# Altium PCB NUC977 DEV BOARD.PcbDoc (part 1 of 5)
Units mil, origin at the board's own origin, x right, y up, seen from the top; angles counter-clockwise.
Board outline 9012.5 x 7677.17 mil, 4 copper layers (Top, 2-GND, 3-POWER, Bottom), stack 35.4 mil thick; 487 components, 451 nets, 1969 pads, 1529 vias.
Unrouted connection lines stored in the file: 1.
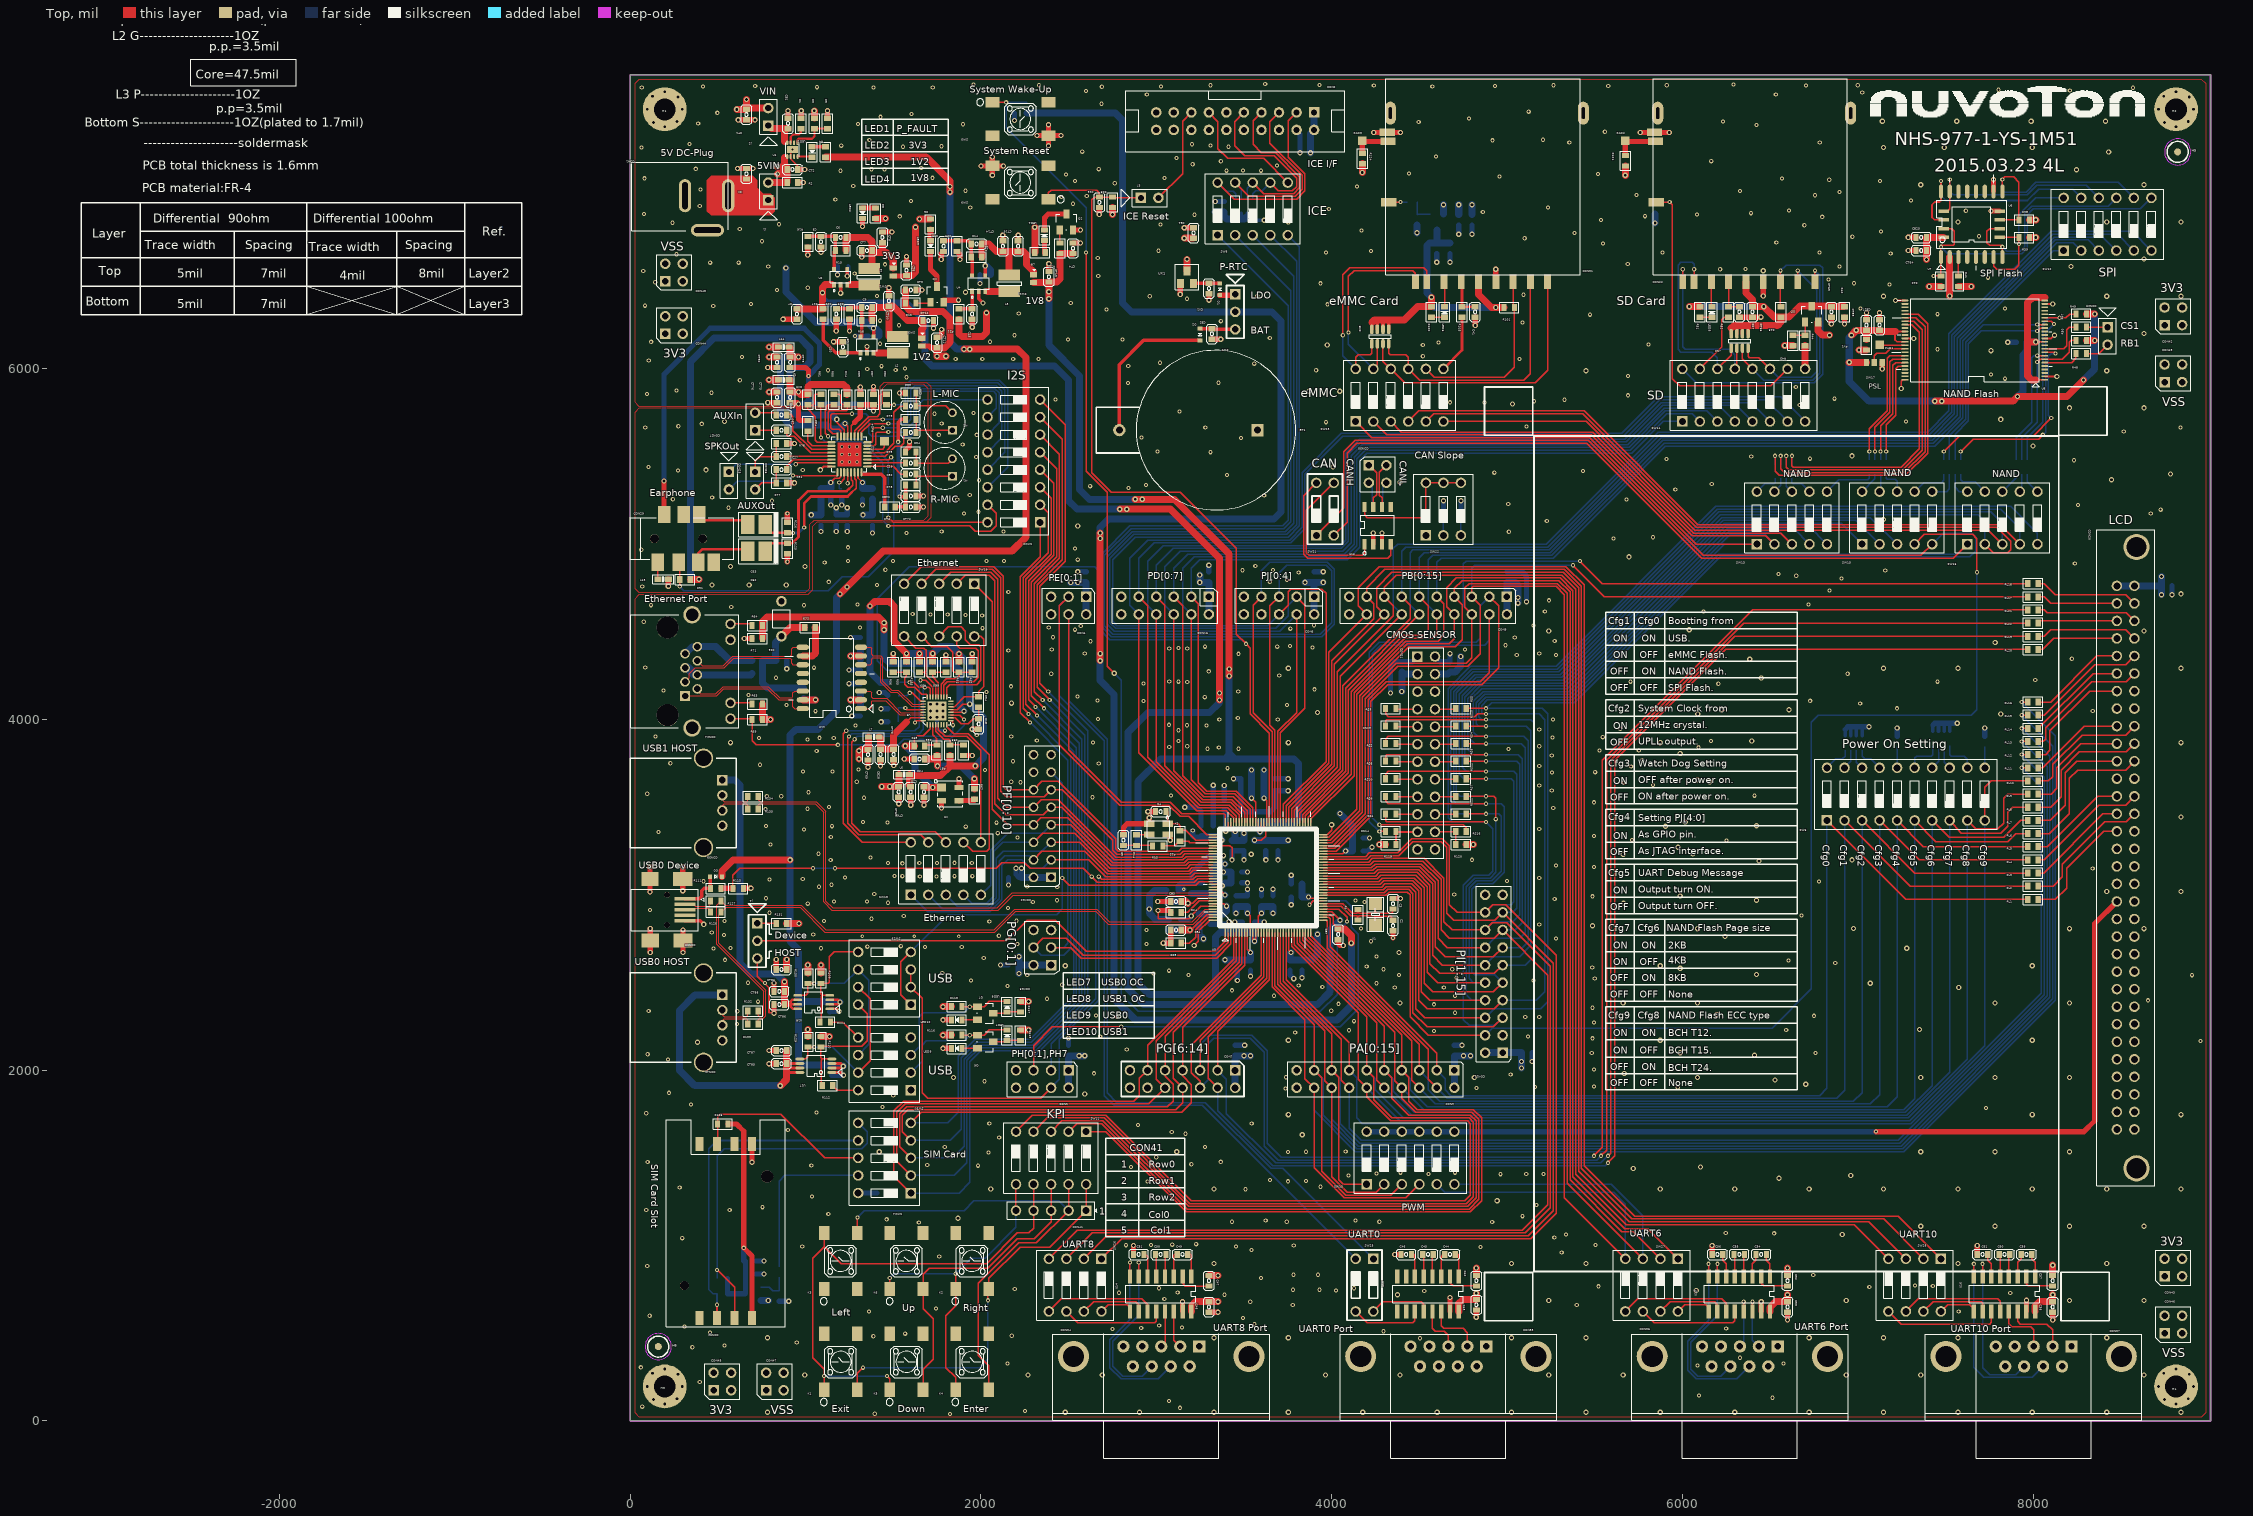
[diagram p0: Top view]
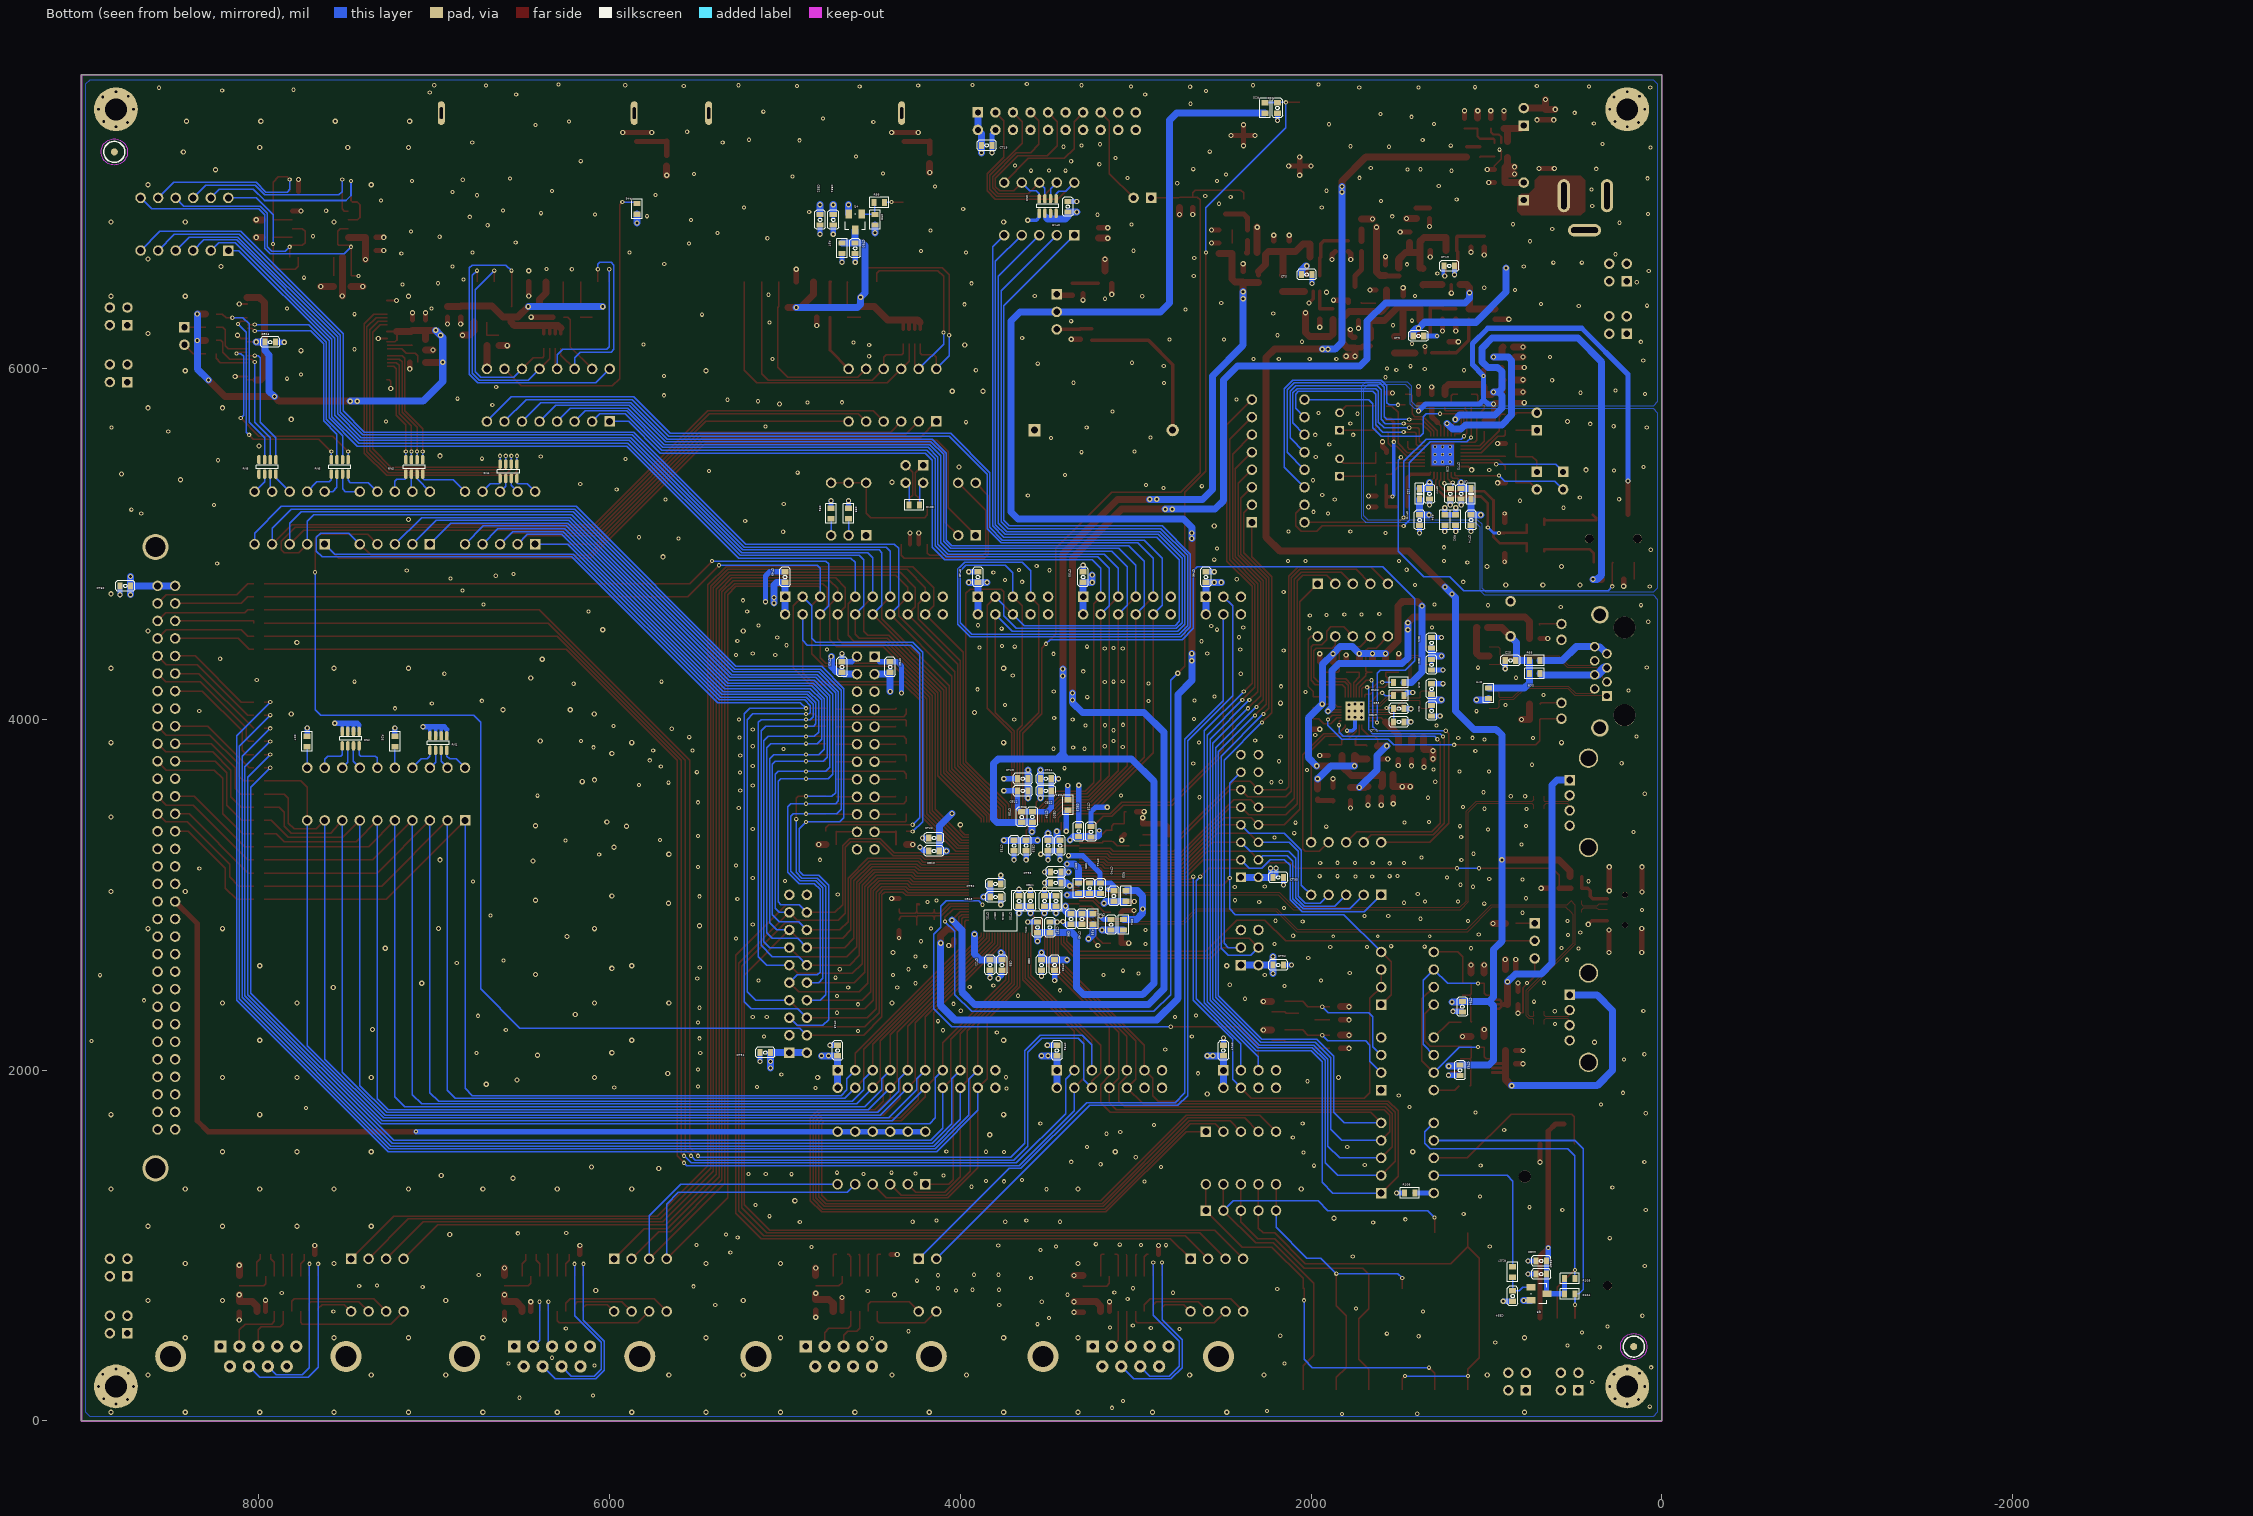
[diagram p1: Bottom view, seen from below]
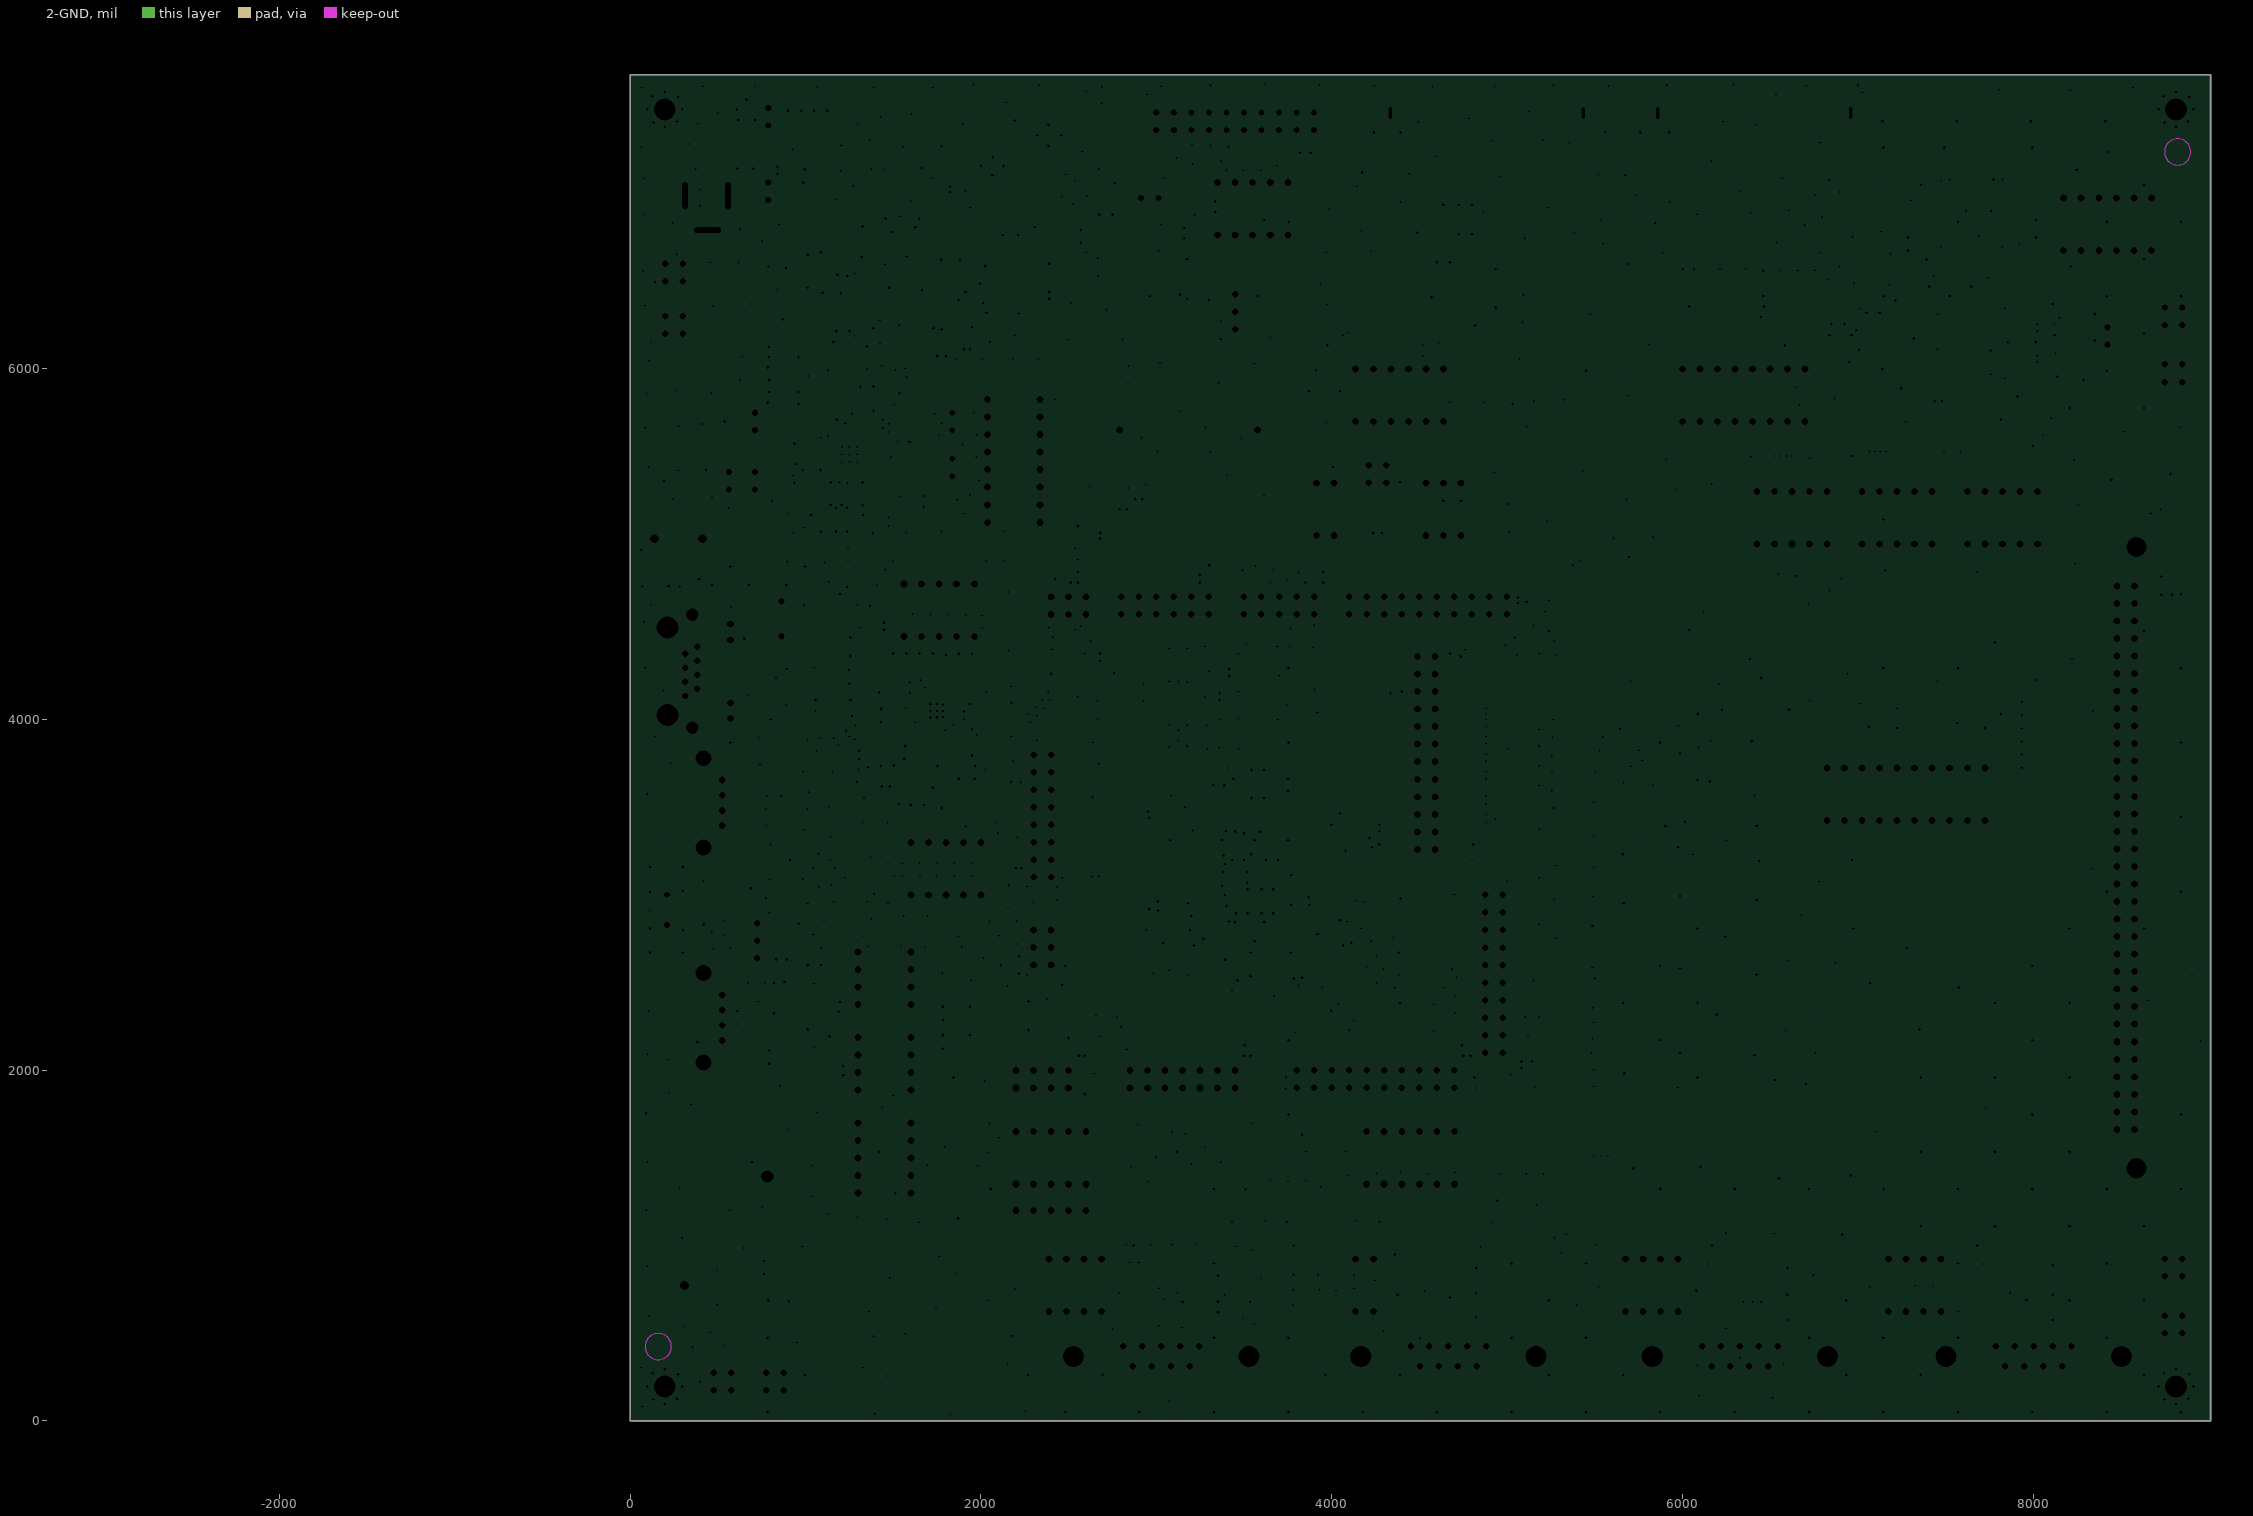
[diagram p2: 2-GND, clearances drawn from the general rule]
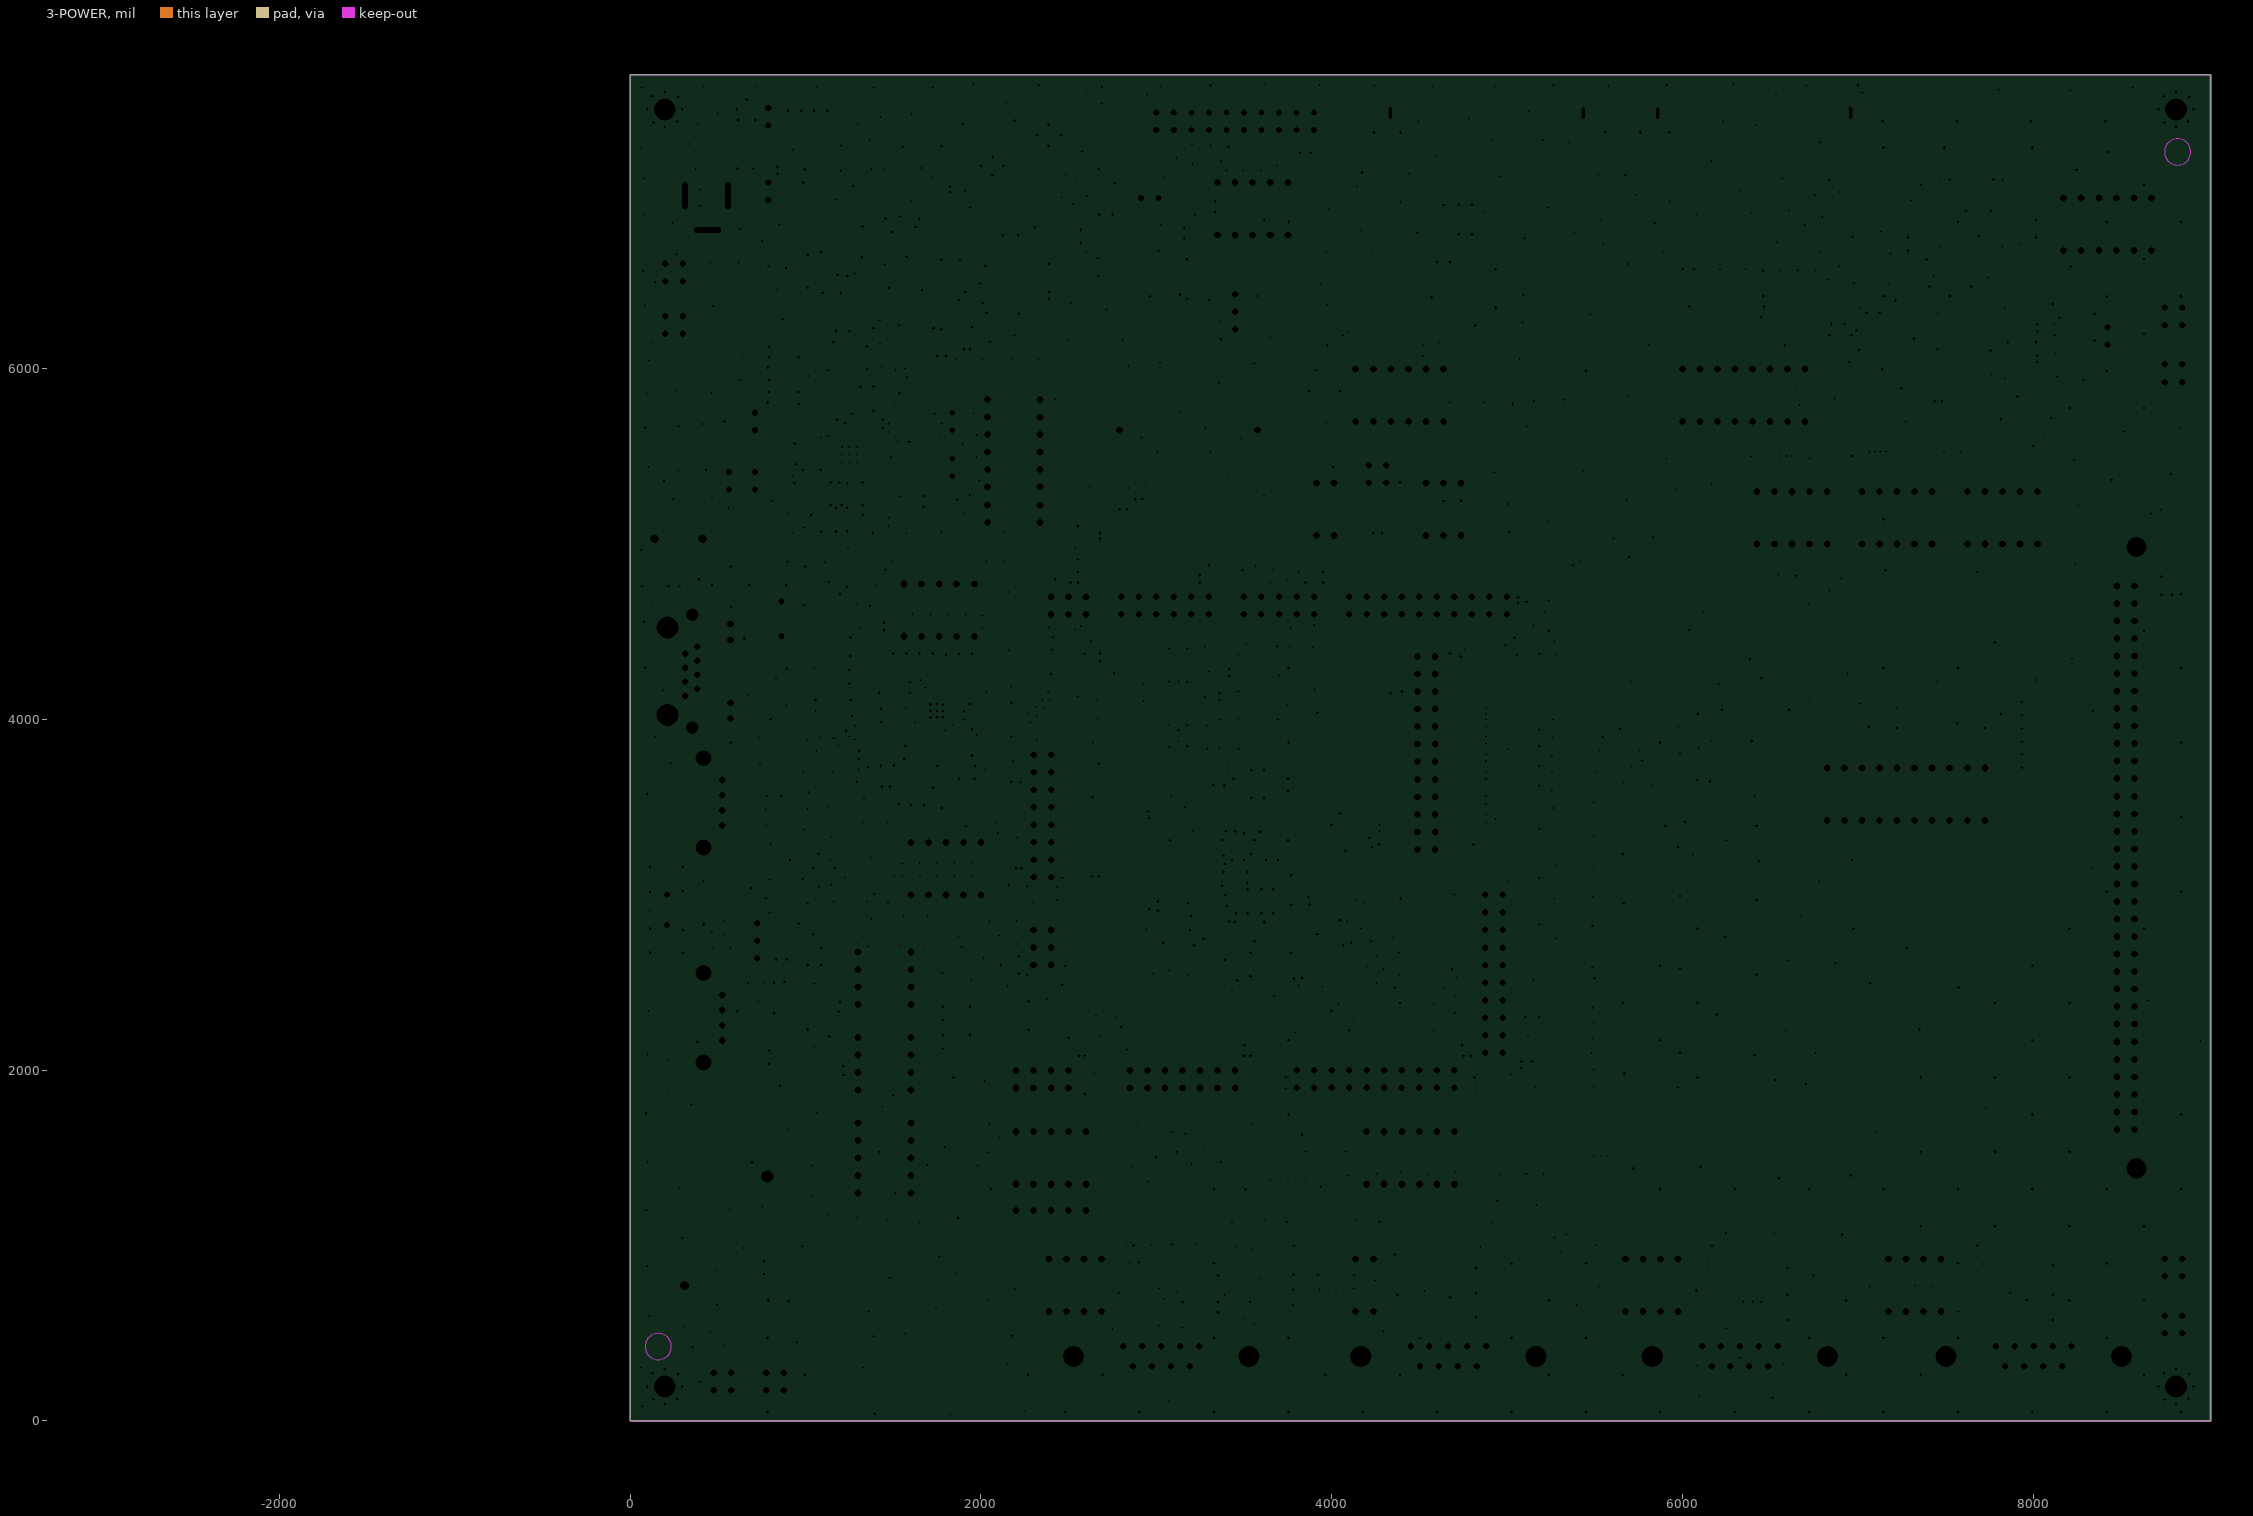
[diagram p3: 3-POWER, clearances drawn from the general rule]

## Layer stack, top to bottom
Solder Mask Top: solder mask 0.4, Solder Resist, Dk 3.5
Top: signal copper 1.35
Dielectric 1: dielectric 10, FR-4, Dk 4.3
2-GND: plane copper 1.35
Dielectric2: dielectric 10, FR-4, Dk 4.3
3-POWER: plane copper 1.35
Dielectric3: dielectric 10, FR-4, Dk 4.3
Bottom: signal copper 1.35
Solder Mask Bottom: solder mask 0.4, Solder Resist, Dk 3.5

## Board outline
0,0 9012.5,0 9012.5,7677.17 0,7677.17

## Design rules (kind name [scope] priority, off if disabled: settings)
Clearance "Clearance - NetClass - USB-5/7/5-90OHM" [InNetClass('USB-5/7/5-90OHM')] p1: gap=7 ignorepadtopadclearanceinfootprint=FALSE except(0: Arc-Hole Track-Hole SMDPad-Hole THPad-Hole Via-Hole Fill-Hole Poly-Hole Region-Hole Text-Hole; 10: Text-Text; 12: Arc-Fill Arc-Poly Arc-Region Track-Fill Track-Poly Track-Region SMDPad-Fill SMDPad-Poly SMDPad-Region THPad-Fill THPad-Poly THPad-Region Via-Fill Via-Poly Via-Region Fill-Fill Fill-Poly Fill-Region Poly-Poly Poly-Region Region-Region)
Clearance "Clearance - NetClass - ETHERNET-4/8/4-100OHM" [InNetClass('ETHERNET-4/8/4-100OHM')] p2: gap=12 ignorepadtopadclearanceinfootprint=FALSE except(0: Arc-Hole Track-Hole SMDPad-Hole THPad-Hole Via-Hole Fill-Hole Poly-Hole Region-Hole Text-Hole; 7: Arc-SMDPad Arc-THPad Arc-Via Arc-Text Track-SMDPad Track-THPad Track-Via Track-Text SMDPad-SMDPad SMDPad-THPad SMDPad-Via SMDPad-Text THPad-THPad THPad-Via THPad-Text Via-Via Via-Text Fill-Text Poly-Text Region-Text; 8: Arc-Arc Arc-Track Track-Track; 10: Text-Text)
Clearance "Clearance - Default - DEFAULT- SMD" [IsVia vs IsSMTPin] p3: gap=6 ignorepadtopadclearanceinfootprint=FALSE
Clearance "Clearance - Default - DEFAULT - Via" [IsVia vs IsVia] p4: gap=6 ignorepadtopadclearanceinfootprint=FALSE
Clearance "Clearance - Default - DEFAULT - Net" [All] p5: gap=12 ignorepadtopadclearanceinfootprint=FALSE except(0: Arc-Hole Track-Hole SMDPad-Hole THPad-Hole Via-Hole Fill-Hole Poly-Hole Region-Hole Text-Hole; 5: Arc-SMDPad Arc-THPad Track-SMDPad Track-THPad SMDPad-SMDPad SMDPad-THPad SMDPad-Via THPad-THPad THPad-Via; 7: Arc-Arc Arc-Track Arc-Via Arc-Text Track-Track Track-Via Track-Text SMDPad-Text THPad-Text Via-Via Via-Text Fill-Text Poly-Text Region-Text; 10: Text-Text)
ComponentClearance "ComponentClearance - Default - DEFAULT" [All] p1: gap=6 collisioncheckmode=3 verticalgap=10 showdistances=FALSE
DiffPairsRouting "DiffPairsRouting - DiffPair - N16118" [InDifferentialPairClass('DiffPairClassFor_DP_GAP_70000_Width_50000')] p1: maxlimit=7 minlimit=7 mostfreqgap=7 toplayer_minwidth=5 toplayer_maxwidth=5 toplayer_prefwidth=5 bottomlayer_minwidth=5 bottomlayer_maxwidth=5 bottomlayer_prefwidth=5 maxuncoupledlength=500
DiffPairsRouting "DiffPairsRouting - DiffPair - Default" [All] p2: maxlimit=8 minlimit=8 mostfreqgap=8 toplayer_minwidth=4 toplayer_maxwidth=4 toplayer_prefwidth=4 bottomlayer_minwidth=4 bottomlayer_maxwidth=4 bottomlayer_prefwidth=4 maxuncoupledlength=500
FanoutControl Fanout_SOIC [IsSOIC] p1: bgadir=Out bgaviamode=Centered fanoutstyle=Auto fanoutdirection=Alternating viagrid=1 // Fanout_SOIC (Default Rule)
FanoutControl Fanout_Small [(CompPinCount < 5)] p2: bgadir=Out bgaviamode=Centered fanoutstyle=Auto fanoutdirection=OutThenIn viagrid=1 // Fanout_Small (Default Rule)
FanoutControl Fanout_LCC [IsLCC] p3: bgadir=Out bgaviamode=Centered fanoutstyle=Auto fanoutdirection=Alternating viagrid=1 // Fanout_LCC (Default Rule)
FanoutControl Fanout_BGA [IsBGA] p4: bgadir=Out bgaviamode=Centered fanoutstyle=Auto fanoutdirection=Alternating viagrid=1 // Fanout_BGA (Default Rule)
HoleToHoleClearance "HoleToHoleClearance - Default - DEFAULT" [All] p1: gap=6 allowstackedmicrovias=TRUE
Length "Default Length" [All] p1: maxlimit=50000 minlimit=0
MaxMinImpedance "Default Impedance" [All] p1: minimum=50.00 maximum=150.0
ParallelSegment "Default Parallel Segment Adjasent" [All] p1: limit=1000 gap=200
ParallelSegment "Default Parallel Segment Same Layer" [All] p2: limit=1000 gap=200
PlaneClearance [All] p1: clearance=20
PlaneConnect "Default PlaneConnect" [All] p1: planeconnectstyle=Relief reliefexpansion=20 reliefentries=0 reliefconductorwidth=20 reliefairgap=10
PolygonConnect "PolygonConnect - Default SMT" [IsSMTPin] p1: connectstyle=Relief reliefconductorwidth=10 reliefentries=4 polygonreliefangle="45 Angle" airgapwidth=10
PolygonConnect "PolygonConnect - Default Pad" [All] p2: connectstyle=Relief reliefconductorwidth=20 reliefentries=4 polygonreliefangle="45 Angle" airgapwidth=10
RoomDefinition "Room: DRW93508986" [All vs False] p1: confinementstyle=ConfineOut formatcopy=TRUE lockcomponents=FALSE outline 8160,570 8435,570 8435,845 8160,845 8160,570
RoomDefinition "Room: DRW86413249" [All vs False] p2: confinementstyle=ConfineOut formatcopy=TRUE lockcomponents=FALSE outline 4875,570 5150,570 5150,845 4875,845 4875,570
RoomDefinition "Room: DRW7866622" [All vs False] p3: confinementstyle=ConfineOut formatcopy=TRUE lockcomponents=FALSE outline 4870,5620 5145,5620 5145,5895 4870,5895 4870,5620
RoomDefinition "Room: DRW11678161" [All vs False] p4: confinementstyle=ConfineOut formatcopy=TRUE lockcomponents=FALSE outline 8150,5625 8425,5625 8425,5900 8150,5900 8150,5625
RoutingLayers "RoutingLayers - Default - DEFAULT" [All] p1: top layer_v5=TRUE bottom layer_v5=TRUE
RoutingPriority "RoutingPriority - Default - DEFAULT" [All] p1: routingpriority=3
RoutingTopology "RoutingTopology - Net - N16076802" [InNet('N16076802') vs InNet('N16076802')] p1: topology=Shortest
RoutingTopology "Default Routing Topology" [All] p2: topology=Shortest
RoutingVias "RoutingVias - Default - DEFAULT" [All] p1: holewidth=16 width=30 viastyle="Through Hole" minholewidth=16 minwidth=30 maxholewidth=16 maxwidth=30
SMDToCorner "SMDToCorner - Default - DEFAULT" [All] p1: distance=60000
SolderMaskExpansion "SolderMaskExpansion from CAM settings" [All] p1: expansion=3
Width "Width - NetClass - USB-5/7/5-90OHM" [InNetClass('USB-5/7/5-90OHM')] p1: maxlimit=100 minlimit=1 preferedwidth=5
Width "Width - NetClass - POWER-40MIL" [InNetClass('POWER-40MIL')] p2: maxlimit=100 minlimit=1 preferedwidth=40
Width "Width - NetClass - GND-30MIL" [InNetClass('GND-30MIL')] p3: maxlimit=100 minlimit=1 preferedwidth=30
Width "Width - NetClass - ETHERNET-4/8/4-100OHM" [InNetClass('ETHERNET-4/8/4-100OHM')] p4: maxlimit=100 minlimit=1 preferedwidth=4
Width "Width - NetClass - CLK-10MIL" [InNetClass('CLK-10MIL')] p5: maxlimit=100 minlimit=3 preferedwidth=10
Width "Default Width" [All] p6: maxlimit=100 minlimit=3 preferedwidth=8
18 further rules are at their usual default settings.

## Classes and differential pairs
net class CLK-10MIL: 50MCLKI EMCLK LCLK RMII0REFCLK S_CLK S_PCLK SC0CLK SDCLK SIICCLK SPICLK
net class ETHERNET-4/8/4-100OHM: MDI_RN MDI_RP MDI_TN MDI_TP RX+ RX- TX+ TX-
net class GND-30MIL: CDAVS PLLVS VS
net class POWER-40MIL: 5VIN EMVD33 NVD33 PHYAD3 PHYAVD33 PHYIOVD33 REGOUT RTCVD SDPWR SDVD33 SPKVD UHVD33 UOVD33 UPL0VD12 UPL1VD12 UV0 UV1 VD12 VD18 VD33 VDDA VDDB VDDC VIN VREF
net class USB-5/7/5-90OHM: N16116600 N16116644 N16117426 N16117430 N16118016 N16118208 UDH0 UDH1 UDO0 UDO1
differential pair class DiffPairClassFor_DP_GAP_70000_Width_50000: N16118 N161166 N161174 UDH UDO
differential pair N16774: +N16774778 -N16774372
differential pair N16118: +N16118208 -N16118016
differential pair RX: +RX+ -RX-
differential pair UDH: +UDH1 -UDH0
differential pair TX: +TX+ -TX-
differential pair MDI_T: +MDI_TP -MDI_TN
differential pair N161174: +N16117426 -N16117430
differential pair DAC: +DAC0 -DAC1
differential pair UDO: +UDO1 -UDO0
differential pair MDI_R: +MDI_RP -MDI_RN
differential pair N161166: +N16116644 -N16116600

## Components (designator, comment, footprint, x,y, rotation, side; value= is the part's Value field where it differs from the comment)
BT1 "BAT$5C$CR2032-4-2" BAT$5C$CR2032-4-2 3183,5650.5 r0 top
C1 "C0603" C0603 662.5,7112.5 r90 top
C2 "C0603" C0603 4350,2825 r270 top
C3 "C0603" C0603 4350,2950 r90 top
C4 "C0603" C0603 3025,3475 r180 top
C5 "C0603" C0603 2812.5,3312.5 r90 top
C6 "C0603" C0603 1200,6750 r0 top
C7 "C0603" C0603 950,6312.5 r270 top
C8 "C0603" C0603 1087.5,6725 r90 top
C9 "C0603" C0603 1350,6350 r180 top
C10 "C0603" C0603 1212.5,6125 r90 top
C11 "C0603" C0603 1175,6312.5 r270 top
C12 "C0603" C0603 2192,7488 r270 bottom
C13 "C0603" C0603 1950,6312.5 r270 top
C14 "C0603" C0603 1975,6712.5 r180 top
C15 "C0603" C0603 1787.5,6700 r270 top
C16 "C0603" C0603 2675,6950 r90 top
C17 "C0603" C0603 6325,6325 r270 top
C18 "C0603" C0603 1987.5,3975 r270 top
C19 "C0603" C0603 1312.5,4175 r90 bottom
C20 "C0603" C0603 1312.5,4050 r270 bottom
C21 "C0603" C0603 1312.5,4437.5 r90 bottom
C22 "C0603" C0603 1312.5,4312.5 r270 bottom
C23 "C0603" C0603 1674.5,3587 r270 top
C24 "C0603" C0603 1650,3775 r180 top
C25 "C0603" C0603 862.5,4337.5 r0 bottom
C26 "CK05" CK05 862.5,4575 r90 top
C27 "C0603" C0603 862.5,5500 r0 top
C28 "C0603" C0603 1206.25,5287.5 r90 bottom
C29 "C0603" C0603 1600,5462.5 r0 top
C30 "C0603" C0603 862.5,5650 r0 top
C31 "C0603" C0603 862.5,5425 r0 top
C32 "C0603" C0603 1600,5400 r0 top
C33 "C0603" C0603 862.5,5737.5 r0 top
C34 "C0603" C0603 1600,5637.5 r0 top
C35 "C0603" C0603 1600,5787.5 r0 top
C41 "C0603" C0603 4818.75,6325 r270 top
C42 "C0603" C0603 4825,800 r90 top
C43 "C0603" C0603 4825,662.5 r270 top
C44 "C0603" C0603 4675,950 r0 top
C45 "C0603" C0603 4550,950 r0 top
C46 "C0603" C0603 4425,950 r0 top
C47 "C0603" C0603 3300,800 r90 top
C48 "C0603" C0603 3300,650 r270 top
C49 "C0603" C0603 3150,950 r0 top
C50 "C0603" C0603 3025,950 r0 top
C51 "C0603" C0603 2900,950 r0 top
C52 "C0603" C0603 6600,800 r90 top
C53 "C0603" C0603 6600,650 r270 top
C54 "C0603" C0603 6450,950 r0 top
C55 "C0603" C0603 6325,950 r0 top
C56 "C0603" C0603 6200,950 r0 top
C57 "C0603" C0603 8112.5,800 r90 top
C58 "C0603" C0603 8112.5,650 r270 top
C59 "C0603" C0603 7962.5,950 r0 top
C60 "C0603" C0603 7837.5,950 r0 top
C61 "C0603" C0603 7712.5,950 r0 top
C62 "CAPR$5C$B-1" CAPR$5C$B-1 720,4960 r0 top
C63 "CAPR$5C$B-1" CAPR$5C$B-1 720,5112 r0 top
C64 "C0603" C0603 3212.5,6775 r90 top
CB1 "C0603" C0603 900,7400 r90 top
CB2 "C0603" C0603 3317,6199.5 r270 top
CB3 "C0603" C0603 3112.5,2962.5 r180 top
CB4 "C0603" C0603 3112.5,2800 r180 top
CB5 "C0603" C0603 3262.5,3037.5 r90 bottom
CB6 "C0603" C0603 3368.75,2862.5 r270 bottom
CB7 "C0603" C0603 4037.5,2775 r270 top
CB8 "C0603" C0603 3537.5,2600 r270 bottom
CB9 "C0603" C0603 3762.5,2600 r270 bottom
CB10 "C0603" C0603 4150,3250 r0 bottom
CB11 "C0603" C0603 3643.75,3593.75 r0 bottom
CB12 "C0603" C0603 3512.5,3593.75 r180 bottom
CB13 "C0603" C0603 3325,3362.5 r90 bottom
CB16 "C0603" C0603 3520,2965 r90 bottom
CB17 "C0603" C0603 3600,2965 r90 bottom
CB18 "C0603" C0603 3800,2987.5 r180 bottom
CB19 "C0603" C0603 3625,3281.25 r270 bottom
CB20 "C0603" C0603 3431.25,3281.25 r270 bottom
CB21 "C0603" C0603 3456.25,3068.75 r0 bottom
CB25 "C0603" C0603 7362.5,6750 r180 top
CB26 "C0603" C0603 7936,6152 r180 bottom
CB27 "C0603" C0603 7125,6250 r90 top
CB28 "C0603" C0603 1427.5,3801 r90 top
CB29 "C0603" C0603 1499.5,4062 r0 bottom
CB30 "C0603" C0603 1600,5275 r180 top
CB31 "C0603" C0603 4725,6850 r90 bottom
CB32 "C0603" C0603 4800,6850 r90 bottom
CB33 "C0603" C0603 687.5,912.5 r180 bottom
CB34 "C0603" C0603 850,712.5 r90 bottom
CM1 "C0603" C0603 3560,2815 r90 bottom
CM4 "C0603" C0603 3590,3445 r90 bottom
CON1 "POWRJACK$5C$3P" POWRJACK$5C$3P 312.5,6987.5 r90 top
CON2 "HEADER10X2$5C$BOX" HEADER10X2$5C$BOX 3900,7462.5 r0 top
CON3 "HEADER10X2$5C$2.54" HEADER10X2$5C$2.54 4700,2000 r180 top
CON4 "HEADER_2X3_2.54MM" HEADER_2X3_2.54MM 2600,4700 r180 top
CON5 "HEADER2X4" HEADER2X4 2500,2000 r180 top
CON6 "CON$2F$5X2B$2F$2.54$2F$M" CON$2F$5X2B$2F$2.54$2F$M 3900,4700 r180 top
CON7 "HEADER7X2" HEADER7X2 3450,2000 r180 top
CON9 "HEADER10X2$5C$2.54" HEADER10X2$5C$2.54 5000,4700 r180 top
CON10 "HEADER8X2$5C$2.54" HEADER8X2$5C$2.54 2400,3100 r90 top
CON11 "HEADER10X2$5C$2.54" HEADER10X2$5C$2.54 4975,2100 r90 top
CON15 "HEADER_2X3_2.54MM" HEADER_2X3_2.54MM 2400,2600 r90 top
CON16 "HEADER_2X6_2.54MM" HEADER_2X6_2.54MM 3300,4700 r180 top
CON20 "M_DIN_32X2$2F$2.54A" M_DIN_32X2$2F$2.54A 8528.15,3212.6 r270 top
CON21 "HEADER12X2-2.54M" HEADER12X2-2.54M 4489.57,4359.55 r270 top
CON22 "AXA2R63061" AXA2R63061 6387.5,6537.5 r180 top
CON23 "SIP$5C$2P-2.54M" SIP$5C$2P-2.54M 8425,6237.5 r270 top
CON24 "RJ45-8P8C$2F$LED" RJ45-8P8C$2F$LED 212.5,4275 r270 top
CON25 "SIP$5C$2P-2.54M" SIP$5C$2P-2.54M 562.5,5412.5 r270 top
CON26 "SIP$5C$2P-2.54M" SIP$5C$2P-2.54M 712.5,5412.5 r270 top
CON27 "SIP$5C$2P-2.54M" SIP$5C$2P-2.54M 712.5,5650 r90 top
CON29 "PHONE-PJK-631" PHONE-PJK-631 0,5031.2 r0 top
CON30 "HEADER2X2" HEADER2X2 4212.5,5450 r270 top
CON31 "AXA2R63061" AXA2R63061 4862.5,6537.5 r180 top
CON32 "SIM-CARD" SIM-CARD 545,1579.5 r270 top
CON33 "DB9FM-L" DB9FM-L 4450,425 r0 top
CON34 "DB9FM-L" DB9FM-L 2812.5,425 r0 top
CON36 "DB9FM-L" DB9FM-L 6112.5,425 r0 top
CON37 "DB9FM-L" DB9FM-L 7787.5,425 r0 top
CON38 "MINI_5P_B_TYPE" MINI_5P_B_TYPE 300,3090 r90 top
CON39 "USB4P" USB4P 525,3525 r270 top
CON40 "USB4P" USB4P 525,2300 r270 top
CON41 "SIP$5C$5P" SIP$5C$5P 2600,1200 r180 top
CON42 "HEADER2X2" HEADER2X2 8750,6250 r0 top
CON43 "HEADER2X2" HEADER2X2 8750,825 r0 top
CON44 "HEADER2X2" HEADER2X2 200,6200 r0 top
CON45 "HEADER2X2" HEADER2X2 475,175 r0 top
CON46 "HEADER2X2" HEADER2X2 8750,500 r0 top
CON47 "HEADER2X2" HEADER2X2 775,175 r0 top
CON48 "HEADER2X2" HEADER2X2 200,6500 r0 top
CON49 "HEADER2X2" HEADER2X2 8750,5925 r0 top
CT1 "C0603" C0603 662.5,7450 r270 top
CT2 "C0603" C0603 925,7137.5 r180 top
CT3 "C0603" C0603 1600,6450 r0 top
CT4 "C0603" C0603 2525,6687.5 r90 top
CT5 "C0603" C0603 2025,6537.5 r180 bottom
CT6 "C0603" C0603 1575,6562.5 r90 top
CT7 "C0603" C0603 1350,6675 r180 top
CT8 "C0603" C0603 1437.5,6750 r90 top
CT9 "C0603" C0603 1387.5,6187.5 r180 bottom
CT10 "C0603" C0603 1475,6387.5 r90 top
CT11 "C0603" C0603 1750,6150 r90 top
CT12 "C0603" C0603 1700,6275 r0 top
CT13 "C0603" C0603 1212.5,6587.5 r180 bottom
CT14 "C0603" C0603 2125,6700 r90 top
CT15 "C0603" C0603 2387.5,6525 r90 top
CT16 "C0603" C0603 2212.5,6700 r90 top
CT18 "C0603" C0603 3387.5,6925 r270 bottom
CT19 "C0603" C0603 3850,7275 r0 bottom
CT20 "C0603" C0603 3462.5,2600 r270 bottom
CT21 "C0603" C0603 3831.25,2600 r270 bottom
CT22 "C0603" C0603 4150,3325 r0 bottom
CT23 "C0603" C0603 3643.75,3662.5 r0 bottom
CT24 "C0603" C0603 3512.5,3662.5 r180 bottom
CT25 "C0603" C0603 3255,3360 r90 bottom
CT30 "C0603" C0603 3455,2965 r90 bottom
CT31 "C0603" C0603 3665,2965 r90 bottom
CT32 "C0603" C0603 3800,3062.5 r180 bottom
CT33 "C0603" C0603 3693.75,3281.25 r270 bottom
CT34 "C0603" C0603 3500,3281.25 r270 bottom
CT35 "C0603" C0603 3456.25,3131.25 r0 bottom
CT37 "C0603" C0603 3490,2815 r90 bottom
CT38 "C0603" C0603 3650,3443.75 r90 bottom
CT40 "C0603" C0603 3125,2993.75 r90 bottom
CT41 "C0603" C0603 3140,2830 r90 bottom
CT43 "C0603" C0603 3306.25,2862.5 r270 bottom
CT44 "C0603" C0603 3200,3037.5 r90 bottom
CT45 "C0603" C0603 4700,2112.5 r270 bottom
CT46 "C0603" C0603 2600,4812.5 r270 bottom
CT47 "C0603" C0603 2500,2112.5 r270 bottom
CT48 "C0603" C0603 3900,4812.5 r270 bottom
CT49 "C0603" C0603 5000,4812.5 r270 bottom
CT50 "C0603" C0603 2187.5,3100 r0 bottom
CT51 "C0603" C0603 5112.5,2100 r180 bottom
CT52 "C0603" C0603 2187.5,2600 r0 bottom
CT53 "C0603" C0603 3300,4812.5 r270 bottom
CT56 "C0603" C0603 3450,2112.5 r270 bottom
CT60 "C0603" C0603 8762.5,4762.5 r180 bottom
CT62 "C0603" C0603 4400,4300 r270 bottom
CT63 "C0603" C0603 4675,4300 r270 bottom
CT64 "C0603" C0603 7362.5,6675 r180 top
CT65 "C0603" C0603 6850,6325 r90 top
CT66 "C0603" C0603 6400,6325 r90 top
CT67 "C0603" C0603 1531.25,3587.5 r270 top
CT68 "C0603" C0603 1599.5,3587 r270 top
CT69 "C0603" C0603 1356.25,3800 r270 top
CT70 "C0603" C0603 1502.5,3801 r270 top
CT71 "C0603" C0603 1499.5,3987 r180 bottom
CT72 "C0603" C0603 1600,5212.5 r180 top
CT73 "C0603" C0603 1143.75,5287.5 r90 bottom
CT74 "C0603" C0603 1087.5,5137.5 r90 bottom
CT75 "C0603" C0603 912.5,5837.5 r90 top
CT76 "C0603" C0603 837.5,5837.5 r90 top
CT77 "C0603" C0603 1325,5287.5 r90 bottom
CT78 "C0603" C0603 1381.25,5137.5 r90 bottom
CT79 "C0603" C0603 912.5,6037.5 r90 top
CT80 "C0603" C0603 4600,6687.5 r90 bottom
CT81 "C0603" C0603 687.5,837.5 r180 bottom
CT82 "C0603" C0603 862.5,2575 r0 top
CT83 "C0603" C0603 1150,2000 r90 bottom
CT84 "C0603" C0603 1137.5,2362.5 r90 bottom
CT85 "C0603" C0603 862.5,2037.5 r0 top
CT86 "C0603" C0603 850,2375 r0 top
CT87 "C0603" C0603 862.5,2112.5 r0 top
CT88 "C0603" C0603 850,2450 r0 top
CT89 "C0603" C0603 7050,6250 r270 top
CT90 "C0603" C0603 837.5,6037.5 r90 top
CX1 "C0603" C0603 3300.5,6458.5 r270 top
D1 "DIDEO_A" DIDEO_A 3362.5,6487.5 r270 top
D2 "DIDEO_A" DIDEO_A 3250,6162.5 r90 top
D3 "DIDEO_A" DIDEO_A 456,3104 r0 top
H1 "H-250" H-250 196.85,7480.31 r0 top
H2 "H-250" H-250 8815.65,7480.31 r0 top
H3 "H-250" H-250 196.85,196.85 r0 top
H4 "H-250" H-250 8815.65,196.85 r0 top
H5 "VIA40N(F_MASK)4L" VIA40N(F_MASK)4L 8825,7237.5 r0 top
H6 "VIA40N(F_MASK)4L" VIA40N(F_MASK)4L 160,424 r0 top
J1 "SIP$5C$2P-2.54M" SIP$5C$2P-2.54M 787.5,6962.5 r90 top
J2 "SIP$5C$2P-2.54M" SIP$5C$2P-2.54M 787.5,7387.5 r90 top
J3 "SIP$5C$2P-2.54M" SIP$5C$2P-2.54M 2912.5,6975 r0 top
J4 "SIP-3P-2.54M" SIP-3P-2.54M 725,2837.5 r270 top
K1 "SW4-SMD" SW4-SMD 1200,337.5 r0 top
K2 "SW4-SMD" SW4-SMD 1950,912.5 r0 top
K3 "SW4-SMD" SW4-SMD 1200,912.5 r0 top
K4 "SW4-SMD" SW4-SMD 1950,337.5 r0 top
K5 "SW4-SMD" SW4-SMD 1575,337.5 r0 top
K6 "SW4-SMD" SW4-SMD 1575,912.5 r0 top
L1 "SMTDR43" SMTDR43 1362.5,6525 r180 top
L2 "SMTDR43" SMTDR43 1525,6137.5 r180 top
L3 "SMTDR43" SMTDR43 2162.5,6487.5 r180 top
L6 "L0603" L0603 1562,3687 r0 top
L7 "L0603" L0603 1390,3901 r0 top
L8 "L0603" L0603 1087.5,5287.5 r270 bottom
L9 "L0603" L0603 875,5937.5 r180 top
L12 "L0603" L0603 1381.25,5287.5 r270 bottom
L13 "L0603" L0603 187.5,4800 r180 top
L14 "L0603" L0603 875,6125 r180 top
LED1 "LED_0603" LED_0603 1037.5,7237.5 r270 top
LED2 "LED_0603" LED_0603 1325,6887.5 r270 top
LED3 "LED_0603" LED_0603 1712.5,6700 r270 top
LED4 "LED_0603" LED_0603 2362.5,6762.5 r90 top
LED5 "LED_0603" LED_0603 6168.75,6325 r90 top
LED6 "LED_0603" LED_0603 4643.75,6325 r90 top
LED7 "LED_0603" LED_0603 2150,2200 r90 top
LED8 "LED_0603" LED_0603 2150,2362.5 r90 top
LED9 "LED_0603" LED_0603 1862.5,2125 r180 top
LED10 "LED_0603" LED_0603 1862.5,2287.5 r180 top
M1 "9.7D2.54MM" 9.7D2.54MM 1837.5,5437.5 r90 top
M2 "9.7D2.54MM" 9.7D2.54MM 1837.5,5700 r90 top
PAD1 "1PAD_1.25X1.25MM" 1PAD_1.25X1.25MM 7125,6137.5 r0 top
PAD2 "1PAD_1.25X1.25MM" 1PAD_1.25X1.25MM 5675,7300 r180 top
PAD3 "1PAD_1.25X1.25MM" 1PAD_1.25X1.25MM 4175,7300 r180 top
PAD4 "1PAD_1.25X1.25MM" 1PAD_1.25X1.25MM 1450,5587.5 r0 top
Q1 "SOT23-BEC" SOT23-BEC 1750,6425 r0 top
Q2 "SOT23-BEC" SOT23-BEC 2487.5,6837.5 r0 top
Q3 "SOT23-GSD" SOT23-GSD 6737.5,6312.5 r0 top
Q4 "SOT23-GSD" SOT23-GSD 4600,6837.5 r0 bottom
Q5 "SOT23-GSD" SOT23-GSD 700,725 r270 bottom
Q6 "SOT23-BEC" SOT23-BEC 2025,2162.5 r270 top
Q7 "SOT23-BEC" SOT23-BEC 2025,2325 r270 top
R1 "R0603" R0603 975,7400 r270 top
R2 "R0603" R0603 925,7062.5 r180 top
R3 "R0603" R0603 1050,7400 r270 top
R4 "R0603" R0603 1112.5,7237.5 r270 top
R5 "R0603" R0603 1125,7400 r90 top
R6 "R0603" R0603 1712.5,6825 r90 top
R7 "R0603" R0603 2337.5,6662.5 r180 top
R8 "R0603" R0603 1400,6887.5 r270 top
R9 "R0603" R0603 4150,2887.5 r270 top
R10 "R0603" R0603 1600,6375 r180 top
R11 "R0603" R0603 2450,6687.5 r270 top
R12 "R0603" R0603 3136,3336 r90 top
R13 "R0603" R0603 3008,3280 r180 top
R14 "R0603" R0603 2887.5,3312.5 r270 top
R15 "R0603" R0603 1200,6675 r0 top
R16 "R0603" R0603 1012.5,6725 r90 top
R17 "R0603" R0603 1100,6312.5 r90 top
R18 "R0603" R0603 1350,6275 r0 top
R19 "R0603" R0603 1250,6312.5 r90 top
R20 "R0603" R0603 2264,7488 r270 bottom
R21 "R0603" R0603 1875,6312.5 r90 top
R22 "R0603" R0603 1975,6637.5 r0 top
R23 "R0603" R0603 1862.5,6700 r90 top
R24 "R0603" R0603 3112.5,2900 r180 top
R25 "R0603" R0603 3112.5,2725 r180 top
R26 "R0603" R0603 7225,3875 r90 bottom
R27 "R0603" R0603 7725,3875 r90 bottom
R28 "R0603" R0603 2750,6950 r90 top
R33 "R0603" R0603 3056.25,2993.75 r90 bottom
R34 "R0603" R0603 3070,2830 r90 bottom
R36 "R0603" R0603 3243.75,2862.5 r270 bottom
R37 "R0603" R0603 3325,3037.5 r90 bottom
R38 "R0603" R0603 7950,6850 r0 top
R39 "R0603" R0603 7950,6750 r0 top
R40 "R0603" R0603 7475,6500 r270 top
R41 "R0603" R0603 7575,6500 r90 top
R42 "R0603" R0603 6925,6325 r90 top
R43 "R0603" R0603 6631.25,6162.5 r270 top
R44 "R0603" R0603 6700,6162.5 r90 top
R45 "R0603" R0603 6562.5,6325 r270 top
R46 "R0603" R0603 5843.75,6912.5 r270 bottom
R47 "R0603" R0603 8275,6237.5 r180 top
R48 "R0603" R0603 8275,6087.5 r180 top
R49 "R0603" R0603 8275,6312.5 r0 top
R50 "R0603" R0603 8275,6162.5 r0 top
R51 "R0603" R0603 6100,6325 r270 top
R52 "R0603" R0603 6262.5,6325 r270 top
R53 "R0603" R0603 1499.5,4137 r0 bottom
R54 "R0603" R0603 1987.5,4100 r270 top
R55 "R0603" R0603 1575,4300 r90 top
R56 "R0603" R0603 1500,4300 r270 top
R57 "R0603" R0603 1825,3825 r270 top
R58 "R0603" R0603 1900,3825 r90 top
R59 "R0603" R0603 1725,4300 r90 top
R60 "R0603" R0603 1800,4300 r270 top
R61 "R0603" R0603 1875,4300 r90 top
R62 "R0603" R0603 1950,4300 r270 top
R63 "R0603" R0603 725,4087.5 r180 top
R64 "R0603" R0603 725,4537.5 r180 top
R65 "R0603" R0603 1650,3850 r180 top
R66 "R0603" R0603 1750,3825 r270 top
R67 "R0603" R0603 1962.5,3575 r90 top
R68 "R0603" R0603 725,4337.5 r180 bottom
R69 "R0603" R0603 725,4000 r180 top
R70 "R0603" R0603 725,4262.5 r180 bottom
R71 "R0603" R0603 725,4462.5 r180 top
R72 "R0603" R0603 1025,4525 r0 top
R73 "R0603" R0603 987.5,4150 r270 bottom
R74 "R0603" R0603 1481.25,5212.5 r0 top
R75 "R0603" R0603 1600,5525 r180 top
R76 "R0603" R0603 862.5,5575 r180 top
R77 "R0603" R0603 862.5,5350 r180 top
R78 "R0603" R0603 1600,5337.5 r180 top
R79 "R0603" R0603 1600,5712.5 r180 top
R80 "R0603" R0603 1162.5,5825 r270 top
R81 "R0603" R0603 1087.5,5825 r270 top
R82 "R0603" R0603 1462.5,5825 r270 top
R83 "R0603" R0603 1600,5862.5 r0 top
R84 "R0603" R0603 1012.5,5675 r270 top
R87 "R0603" R0603 1387.5,5825 r90 top
R89 "R0603" R0603 1312.5,5825 r90 top
R91 "R0603" R0603 312.5,4800 r0 top
R92 "R0603" R0603 1175,5137.5 r270 bottom
R94 "R0603" R0603 1237.5,5137.5 r270 bottom
R95 "R0603" R0603 4637.5,5175 r270 bottom
R96 "R0603" R0603 4737.5,5175 r270 bottom
R97 "R0603" R0603 4675,6687.5 r90 bottom
R98 "R0603" R0603 4487.5,6850 r270 bottom
R99 "R0603" R0603 4462.5,6950 r0 bottom
R100 "R0603" R0603 4262.5,5225 r0 bottom
R101 "R0603" R0603 5012.5,6350 r180 top
R102 "R0603" R0603 4568.75,6325 r270 top
R103 "R0603" R0603 4743.75,6325 r270 top
R104 "R0603" R0603 525,725 r180 bottom
R105 "R0603" R0603 525,812.5 r180 bottom
R106 "R0603" R0603 528,1693.5 r180 top
R107 "R0603" R0603 850,850 r270 bottom
R108 "R0603" R0603 1437.5,1300 r0 bottom
R109 "R0603" R0603 1087.5,2525 r90 top
R110 "R0603" R0603 1087.5,2162.5 r90 top
R111 "R0603" R0603 487.5,3037.5 r180 top
R112 "R0603" R0603 1125,1912.5 r0 top
R113 "R0603" R0603 615.5,3037.5 r180 top
R114 "R0603" R0603 1112.5,2275 r0 top
R115 "R0603" R0603 2225,2200 r90 top
R116 "R0603" R0603 1862.5,2200 r180 top
R117 "R0603" R0603 2225,2362.5 r90 top
R118 "R0603" R0603 1862.5,2362.5 r180 top
R119 "R0603" R0603 4337.5,3287.5 r0 top
R120 "R0603" R0603 4737.5,3287.5 r180 top
R121 "R0603" R0603 5675,7187.5 r270 top
R122 "R0603" R0603 1500,4212.5 r180 bottom
R123 "R0603" R0603 1650,4300 r90 top
R124 "R0603" R0603 4175,7200 r270 top
R125 "R0603" R0603 896,4976 r270 top
R126 "R0603" R0603 896,5096 r90 top
R127 "R0603" R0603 487.5,2965.5 r0 top
R128 "R0603" R0603 487.5,2901.5 r0 top
R129 "R0603" R0603 1012.5,2162.5 r90 top
R130 "R0603" R0603 1012.5,2525 r90 top
R131 "R0603" R0603 862.5,2837.5 r0 top
R132 "R0603" R0603 700,2337.5 r0 top
R133 "R0603" R0603 700,2262.5 r0 top
R134 "R0603" R0603 700,3562.5 r0 top
R135 "R0603" R0603 700,3490.5 r0 top
RG1 "R0603" R0603 3387.5,3512.5 r270 bottom
RL1 "R0603" R0603 8000,2975 r0 top
RL2 "R0603" R0603 8000,3050 r0 top
RL3 "R0603" R0603 8000,3125 r0 top
RL4 "R0603" R0603 8000,3200 r0 top
RL5 "R0603" R0603 8000,3275 r0 top
RL6 "R0603" R0603 8000,3350 r0 top
RL7 "R0603" R0603 8000,3425 r0 top
RL8 "R0603" R0603 8000,3500 r0 top
RL9 "R0603" R0603 8000,3575 r0 top
RL10 "R0603" R0603 8000,3650 r0 top
RL11 "R0603" R0603 8000,3725 r0 top
RL12 "R0603" R0603 8000,3800 r0 top
RL13 "R0603" R0603 8000,3875 r0 top
RL14 "R0603" R0603 8000,3950 r0 top
RL15 "R0603" R0603 8000,4025 r0 top
RL16 "R0603" R0603 8000,4100 r0 top
RL17 "R0603" R0603 8000,4700 r0 top
RL18 "R0603" R0603 8000,4775 r0 top
RL19 "R0603" R0603 8000,4475 r0 top
RL20 "R0603" R0603 8000,4400 r0 top
RL21 "R0603" R0603 8000,4625 r0 top
RL22 "R0603" R0603 8000,4550 r0 top
RN1 "8P4RA" 8P4RA 7025,3825 r180 bottom
RN2 "8P4RA" 8P4RA 7525,3850 r180 bottom
RN3 "8P4RA" 8P4RA 3550,6887.5 r180 bottom
RN4 "8P4RA" 8P4RA 6625,5375 r180 bottom
RN5 "8P4RA" 8P4RA 7162.5,5400 r180 bottom
RN6 "8P4RA" 8P4RA 7587.5,5400 r180 bottom
RN7 "8P4RA" 8P4RA 6375,6200 r180 top
RN8 "8P4RA" 8P4RA 8000,5400 r180 bottom
RN9 "8P4RA" 8P4RA 4325,6225 r180 top
RS1 "R0603" R0603 4337.5,3462.5 r0 top
RS2 "R0603" R0603 4337.5,3862.5 r0 top
RS3 "R0603" R0603 4737.5,4062.5 r180 top
RS4 "R0603" R0603 4737.5,3862.5 r180 top
RS5 "R0603" R0603 4337.5,4062.5 r0 top
RS6 "R0603" R0603 4337.5,3762.5 r0 top
RS7 "R0603" R0603 4737.5,3562.5 r180 top
RS8 "R0603" R0603 4737.5,3762.5 r180 top
RS9 "R0603" R0603 4337.5,3562.5 r0 top
RS10 "R0603" R0603 4337.5,3662.5 r0 top
RS11 "R0603" R0603 4737.5,3462.5 r180 top
RS12 "R0603" R0603 4737.5,3662.5 r180 top
RS13 "R0603" R0603 4337.5,3962.5 r0 top
RS14 "R0603" R0603 4337.5,3362.5 r0 top
RS15 "R0603" R0603 4737.5,3962.5 r180 top
RS16 "R0603" R0603 4737.5,3362.5 r180 top
RV1 "R0603" R0603 7050,6137.5 r90 top
RX3 "R0603" R0603 1012.5,5825 r270 top
RX4 "R0603" R0603 1237.5,5825 r270 top
SW1 "PAD2P" PAD2P 1500,6575 r270 top
SW2 "SIP-3P-2.54M" SIP-3P-2.54M 3450,6425 r270 top
SW3 "PAD2P" PAD2P 1662.5,6175 r270 top
SW4 "PAD2P" PAD2P 2300,6537.5 r270 top
SW5 "SW4-SMD" SW4-SMD 2225,7425 r270 top
SW6 "SWDIP-10-2.54X7.62M" SWDIP-10-2.54X7.62M 6825,3425 r0 top
SW8 "SWDIP-5-2.54X7.62M" SWDIP-5-2.54X7.62M 3350,6762.5 r0 top
SW9 "SW4-SMD" SW4-SMD 2225,7062.5 r90 top
SW10 "SWDIP-6-2.54X7.62M" SWDIP-6-2.54X7.62M 4200,1350 r0 top
SW11 "SWDIP-5-2.54X7.62M" SWDIP-5-2.54X7.62M 2600,1650 r180 top
SW12 "SWDIP-6-2.54X7.62M" SWDIP-6-2.54X7.62M 8175,6675 r0 top
SW13 "SWDIP-5-2.54X7.62M" SWDIP-5-2.54X7.62M 6425,5000 r0 top
SW14 "SWDIP-8-2.54X7.62M" SWDIP-8-2.54X7.62M 6000,5700 r0 top
SW15 "SWDIP-5-2.54X7.62M" SWDIP-5-2.54X7.62M 7025,5000 r0 top
SW16 "SWDIP-5-2.54X7.62M" SWDIP-5-2.54X7.62M 7625,5000 r0 top
SW17 "PAD3P" PAD3P 7050,6037.5 r0 top
SW18 "SWDIP-5-2.54X7.62M" SWDIP-5-2.54X7.62M 1600,3000 r0 top
SW19 "SWDIP-5-2.54X7.62M" SWDIP-5-2.54X7.62M 1962,4774.5 r180 top
SW20 "SWDIP-8-2.54X7.62M" SWDIP-8-2.54X7.62M 2337.5,5125 r90 top
SW21 "SWDIP-2" SWDIP-2 3912.5,5050 r0 top
SW22 "SWDIP-3-2.54X7.62M" SWDIP-3-2.54X7.62M 4537.5,5050 r0 top
SW23 "SWDIP-6-2.54X7.62M" SWDIP-6-2.54X7.62M 4137.5,5700 r0 top
SW24 "SWDIP-5-2.54X7.62M" SWDIP-5-2.54X7.62M 1600,1300 r90 top
SW25 "SWDIP-2" SWDIP-2 4237.5,925 r180 top
SW26 "SWDIP-4-2.54X7.62M" SWDIP-4-2.54X7.62M 2687.5,925 r180 top
SW27 "SWDIP-4-2.54X7.62M" SWDIP-4-2.54X7.62M 5975,925 r180 top
SW28 "SWDIP-4-2.54X7.62M" SWDIP-4-2.54X7.62M 7475,925 r180 top
SW29 "SWDIP-4-2.54X7.62M" SWDIP-4-2.54X7.62M 1600,2374.5 r90 top
SW30 "SWDIP-4-2.54X7.62M" SWDIP-4-2.54X7.62M 1600,1887 r90 top
U1 "TDFN2X2-8" TDFN2X2-8 925,7250 r0 top
U2 "TSOT-25" TSOT-25 1200,6525 r0 top
U3 "TSOT-25" TSOT-25 1350,6137.5 r0 top
U4 "TSOT-25" TSOT-25 1987.5,6487.5 r0 top
U5 "LQFP128" LQFP128 3637.5,3100 r0 top
U6 "SOIC-8P_208MIL" SOIC-8P_208MIL 7650,6825 r180 top
U7 "SOP16$2F$10.4$2F$1.27" SOP16$2F$10.4$2F$1.27 7475,6637.5 r0 top
U8 "SOP48-0.5MM" SOP48-0.5MM 8075,5937.5 r180 top
U9 "QFN32P-0.4X4M" QFN32P-0.4X4M 1749.5,4049.5 r90 top
U10 "TS6121C" TS6121C 1150,4237.5 r90 top
U11 "QFN32$2F$5X5$2F$0.5" QFN32$2F$5X5$2F$0.5 1250,5512.5 r180 top
U12 "SO-8-1.27X5.4M" SO-8-1.27X5.4M 4187.5,5000 r0 top
U13 "SOP16$2F$150" SOP16$2F$150 4550,725 r180 top
U14 "SOP16$2F$150" SOP16$2F$150 3025,725 r180 top
U15 "SOP16$2F$150" SOP16$2F$150 6325,725 r180 top
U16 "SOP16$2F$150" SOP16$2F$150 7837.5,725 r180 top
U17 "SOP8$2F$4.9$2F$0.65" SOP8$2F$4.9$2F$0.65 1150,1987.5 r90 top
U18 "SOP8$2F$4.9$2F$0.65" SOP8$2F$4.9$2F$0.65 1137.5,2350 r90 top
UX1 "SOT23" SOT23 3175,6487.5 r0 top
X1 "TXC-9H_T9" TXC-9H_T9 4250,2950 r0 top
X2 "XRGBBCNANF-27MHZ" XRGBBCNANF-27MHZ 3012.5,3375 r180 top
X3 "SOT-143" SOT-143 1775,3612.5 r270 top

## Footprints (in the part's own frame and the unit in brackets; to place one, negate y for a bottom-side part, rotate by r counter-clockwise, add the part's x,y. Pads: shape width x height; smd on the part's side, far side on the other; paste and mask are expansions set on the pad)
1PAD_1.25X1.25MM [mm]
  rect 1.25x1.25 smd: \(0,0)
8P4RA [mil]
  oval 20x55 smd: 1(96,0) 2(96,82) 3(64,0) 4(64,82) 5(32,0) 6(32,82) 7(0,0) 8(0,82)
  silkscreen extent -15,31 111,51
9.7D2.54MM [mil]
  rect 50x50 / inner round 50 / far side rect 50x50 hole 32 mask+4: 1(-50,0)
  round 50 hole 32 mask+4: 2(50,0)
  silkscreen extent -123,-73 113,163
AXA2R63061 [mm]
  rect 1x2.1 smd: 1(-6.875,1.05) 2(-4.375,1.05) 3(-1.875,1.05) 4(0.625,1.05) 5(3.125,1.05) 6(5.625,1.05) 7(8.125,1.05) 8(9.775,1.05) 9(-9.375,1.05)
  rect 2.2x1.2 smd: 10(13.63,-10.5)
  rect 2.2x1.1 smd: 11(13.73,-19.3) 12(13.85,-20.6)
  oval 1.6x3.3 / inner oval 1.016x3.429 / far side oval 1.016x3.429 hole 0.45 slot 1.65 at 90 deg: 13(-14.55,-23.4) 14(13.4,-23.4)
  silkscreen extent -14.08,-28.4 14.08,0
BAT$5C$CR2032-4-2 [mil]
  rect 70x70 / inner round 70 / far side rect 70x70 hole 40: 1(393.7,0)
  round 70 hole 40: 2(-393.7,0)
  silkscreen extent -525,-455 612,455
C0603 [mil]
  rect 30x40 smd: 1(-30,0) 2(30,0)
  silkscreen extent -55,-30 55,30
CAPR$5C$B-1 [mil]
  rect 75x110 smd: 1(50,0) 2(-50,0)
  silkscreen extent -100,-70 124,70
CK05 [mil]
  round 60 hole 35: 1(-100,0) 2(100,0)
  silkscreen extent -50,-50 50,50
CON$2F$5X2B$2F$2.54$2F$M [mil]
  rect 60x60 / inner round 60 / far side rect 60x60 hole 37: 1(0,0)
  round 60 hole 37: 2(0,100) 3(100,0) 4(100,100) 5(200,0) 6(200,100) 7(300,0) 8(300,100) 9(400,0) 10(400,100)
  silkscreen extent -50,-50 450,150
DB9FM-L [mil]
  rect 70x70 / inner round 70 / far side rect 70x70 hole 37: 1(432,0)
  round 70 hole 37: 2(324,0) 3(216,0) 4(108,0) 5(0,0) 6(378,-114) 7(270,-114) 8(162,-114) 9(54,-114)
  round 177 hole 120: 10(-284,-57) 11(716,-57)
  silkscreen extent -402,-638 834,71
DIDEO_A [mil]
  rect 23x27 smd: 1(0,0) 2(67,0)
  silkscreen extent 25,-10 40,10
H-250 [mil]
  round 250 / inner round 200 / far side round 250 hole 125: 1(0,0)
  round 40 hole 16: 2(-100,0) 3(100,0) 4(0,100) 5(0,-100) 6(-65,-75) 7(70,-70) 8(-70,75) 9(75,70)
HEADER2X2 [mil]
  rect 60x60 / inner round 60 / far side rect 60x60 hole 37: 1(0,0)
  round 60 hole 37: 2(0,100) 3(100,0) 4(100,100)
  silkscreen extent -50,-50 150,150
HEADER2X4 [mil]
  rect 60x60 / inner round 60 / far side rect 60x60 hole 40: 1(0,0)
  round 60 hole 40: 2(0,100) 3(100,0) 4(100,100) 5(200,0) 6(200,100) 7(300,0) 8(300,100)
  silkscreen extent -50,-50 350,150
HEADER7X2 [mil]
  rect 60x60 / inner round 60 / far side rect 60x60 hole 40: 1(0,0)
  round 60 hole 40: 2(0,100) 3(100,0) 4(100,100) 5(200,0) 6(200,100) 7(300,0) 8(300,100) 9(400,0) 10(400,100) 11(500,0) 12(500,100) 13(600,0) 14(600,100)
  silkscreen extent -50,-50 650,150
HEADER8X2$5C$2.54 [mil]
  rect 55x55 / inner round 55 / far side rect 55x55 hole 37: 1(0,0)
  round 55 hole 37: 2(0,100) 3(100,0) 4(100,100) 5(200,0) 6(200,100) 7(300,0) 8(300,100) 9(400,0) 10(400,100) 11(500,0) 12(500,100) 13(600,0) 14(600,100) 15(700,0) 16(700,100)
  silkscreen extent -50,-50 750,150
HEADER10X2$5C$2.54 [mil]
  rect 60x60 / inner round 60 / far side rect 60x60 hole 37: 1(0,0)
  round 60 hole 37: 2(0,100) 3(100,0) 4(100,100) 5(200,0) 6(200,100) 7(300,0) 8(300,100) 9(400,0) 10(400,100) 11(500,0) 12(500,100) 13(600,0) 14(600,100) 15(700,0) 16(700,100) 17(800,0) 18(800,100) 19(900,0) 20(900,100)
  silkscreen extent -50,-50 950,150
HEADER10X2$5C$BOX [mil]
  rect 60x60 / inner round 60 / far side rect 60x60 hole 35: 1(0,0)
  round 60 hole 35: 2(0,-100) 3(-100,0) 4(-100,-100) 5(-200,0) 6(-200,-100) 7(-300,0) 8(-300,-100) 9(-400,0) 10(-400,-100) 11(-500,0) 12(-500,-100) 13(-600,0) 14(-600,-100) 15(-700,0) 16(-700,-100) 17(-800,0) 18(-800,-100) 19(-900,0) 20(-900,-100)
  silkscreen extent -1075,-225 175,125
HEADER12X2-2.54M [mil]
  rect 60x60 / inner round 60 / far side rect 60x60 hole 40: 1(0,0)
  round 60 hole 40: 2(0,100) 3(100,0) 4(100,100) 5(200,0) 6(200,100) 7(300,0) 8(300,100) 9(400,0) 10(400,100) 11(500,0) 12(500,100) 13(600,0) 14(600,100) 15(700,0) 16(700,100) 17(800,0) 18(800,100) 19(900,0) 20(900,100) 21(1000,0) 22(1000,100) 23(1100,0) 24(1100,100)
  silkscreen extent -50,-50 1150,150
HEADER_2X3_2.54MM [mil]
  rect 60x60 / inner round 60 / far side rect 60x60 hole 40: 1(0,0)
  round 60 hole 40: 2(0,100) 3(100,0) 4(100,100) 5(200,0) 6(200,100)
  silkscreen extent -50,-50 250,150
HEADER_2X6_2.54MM [mil]
  rect 60x60 / inner round 60 / far side rect 60x60 hole 37: 1(0,0)
  round 60 hole 37: 2(0,100) 3(100,0) 4(100,100) 5(200,0) 6(200,100) 7(300,0) 8(300,100) 9(400,0) 10(400,100) 11(500,0) 12(500,100)
  silkscreen extent -50,-50 550,150
L0603 [mil]
  rect 40x30 smd: 1(-30,0) 2(30,0)
  silkscreen extent -60,-25 60,25
LED_0603 [mil]
  rect 30x40 smd: 1(-30,0) 2(30,0)
  silkscreen extent -55,-30 55,30
LQFP128 [mm]
  oval 0.203x1.2 smd: 1(-6.2,-8) 2(-5.8,-8) 3(-5.4,-8) 4(-5,-8) 5(-4.6,-8) 6(-4.2,-8) 7(-3.8,-8) 8(-3.4,-8) 9(-3,-8) 10(-2.6,-8) 11(-2.2,-8) 12(-1.8,-8) 13(-1.4,-8) 14(-1,-8) 15(-0.6,-8) 16(-0.2,-8) 17(0.2,-8) 18(0.6,-8) 19(1,-8) 20(1.4,-8) 21(1.8,-8) 22(2.2,-8) 23(2.6,-8) 24(3,-8) 25(3.4,-8) 26(3.8,-8) 27(4.2,-8) 28(4.6,-8) 29(5,-8) 30(5.4,-8) 31(5.8,-8) 32(6.2,-8) 65(6.2,8) 66(5.8,8) 67(5.4,8) 68(5,8) 69(4.6,8) 70(4.2,8) 71(3.8,8) 72(3.4,8) 73(3,8) 74(2.6,8) 75(2.2,8) 76(1.8,8) 77(1.4,8) 78(1,8) 79(0.6,8) 80(0.2,8) 81(-0.2,8) 82(-0.6,8) 83(-1,8) 84(-1.4,8) 85(-1.8,8) 86(-2.2,8) 87(-2.6,8) 88(-3,8) 89(-3.4,8) 90(-3.8,8) 91(-4.2,8) 92(-4.6,8) 93(-5,8) 94(-5.4,8) 95(-5.8,8) 96(-6.2,8)
  oval 1.2x0.203 smd: 33(8,-6.2) 34(8,-5.8) 35(8,-5.4) 36(8,-5) 37(8,-4.6) 38(8,-4.2) 39(8,-3.8) 40(8,-3.4) 41(8,-3) 42(8,-2.6) 43(8,-2.2) 44(8,-1.8) 45(8,-1.4) 46(8,-1) 47(8,-0.6) 48(8,-0.2) 49(8,0.2) 50(8,0.6) 51(8,1) 52(8,1.4) 53(8,1.8) 54(8,2.2) 55(8,2.6) 56(8,3) 57(8,3.4) 58(8,3.8) 59(8,4.2) 60(8,4.6) 61(8,5) 62(8,5.4) 63(8,5.8) 64(8,6.2) 97(-8,6.2) 98(-8,5.8) 99(-8,5.4) 100(-8,5) 101(-8,4.6) 102(-8,4.2) 103(-8,3.8) 104(-8,3.4) 105(-8,3) 106(-8,2.6) 107(-8,2.2) 108(-8,1.8) 109(-8,1.4) 110(-8,1) 111(-8,0.6) 112(-8,0.2) 113(-8,-0.2) 114(-8,-0.6) 115(-8,-1) 116(-8,-1.4) 117(-8,-1.8) 118(-8,-2.2) 119(-8,-2.6) 120(-8,-3) 121(-8,-3.4) 122(-8,-3.8) 123(-8,-4.2) 124(-8,-4.6) 125(-8,-5) 126(-8,-5.4) 127(-8,-5.8) 128(-8,-6.2)
  silkscreen extent -10.5,-10.5 10.4,10.3
M_DIN_32X2$2F$2.54A [mil]
  round 60 hole 40: 1(-1550,-50) 2(-1550,50) 3(-1450,-50) 4(-1450,50) 5(-1350,-50) 6(-1350,50) 7(-1250,-50) 8(-1250,50) 9(-1150,-50) 10(-1150,50) 11(-1050,-50) 12(-1050,50) 13(-950,-50) 14(-950,50) 15(-850,-50) 16(-850,50) 17(-750,-50) 18(-750,50) 19(-650,-50) 20(-650,50) 21(-550,-50) 22(-550,50) 23(-450,-50) 24(-450,50) 25(-350,-50) 26(-350,50) 27(-250,-50) 28(-250,50) 29(-150,-50) 30(-150,50) 31(-50,-50) 32(-50,50) 33(50,-50) 34(50,50) 35(150,-50) 36(150,50) 37(250,-50) 38(250,50) 39(350,-50) 40(350,50) 41(450,-50) 42(450,50) 43(550,-50) 44(550,50) 45(650,-50) 46(650,50) 47(750,-50) 48(750,50) 49(850,-50) 50(850,50) 51(950,-50) 52(950,50) 53(1050,-50) 54(1050,50) 55(1150,-50) 56(1150,50) 57(1250,-50) 58(1250,50) 59(1350,-50) 60(1350,50) 61(1450,-50) 62(1450,50) 63(1550,-50) 64(1550,50)
  round 150 hole 115: 65(-1771.65,61.81) 66(1771.65,61.81)
  silkscreen extent -1870,-165 1870,165
MINI_5P_B_TYPE [mm]
  rect 0.5x3.1 smd: 1(-2.85,-0.31) 2(-3.65,-0.31) 3(-4.45,-0.31) 4(-5.25,-0.31) 5(-6.05,-0.31)
  rect 2x2.5 smd: 6(-8.9,4.72) 8(0,4.74)
  rect 2x2.794 smd: 7(-8.89,-0.01) 9(0,0)
  round 0.813 hole 0.813 unplated: 10(-6.65,2.29) 11(-2.25,2.29)
  silkscreen extent -7.45,-3.09 -1.45,7.49
PAD2P [mil]
  rect 30x40 smd: 1(0,0) 2(45,0)
  silkscreen extent -30,-5 -22,13
PAD3P [mil]
  rect 30x40 smd: 1(0,0) 2(45,0) 3(90,0)
PHONE-PJK-631 [mm]
  round 1.3 hole 1.3 unplated: 8(3.5,0) 9(10.5,0)
  rect 1.8x2.5 smd: A(4,-3.4) B(7,-3.4) C(9.85,-3.4) D(10,3.5) E(7.75,3.5) F(12.1,-3.4) G(4.9,3.5)
  silkscreen extent 0,-2.95 15,3.05
POWRJACK$5C$3P [mm]
  oval 4.8x1.8 hole 0.8 slot 3.9 at 0 deg: 1(0,-6.25) 2(0,0)
  oval 1.8x4.8 hole 0.8 slot 3.9 at 90 deg: 3(-5,-3.25)
  silkscreen extent -5.1,-6.25 4.83,7.75
QFN32$2F$5X5$2F$0.5 [mm]
  oval 1.2x0.3 smd: 1(-2.6,1.75) 2(-2.6,1.25) 3(-2.6,0.75) 4(-2.6,0.25) 5(-2.6,-0.25) 6(-2.6,-0.75) 7(-2.6,-1.25) 8(-2.6,-1.75) 17(2.6,-1.75) 18(2.6,-1.25) 19(2.6,-0.75) 20(2.6,-0.25) 21(2.6,0.25) 22(2.6,0.75) 23(2.6,1.25) 24(2.6,1.75)
  oval 0.3x1.2 smd: 9(-1.75,-2.6) 10(-1.25,-2.6) 11(-0.75,-2.6) 12(-0.25,-2.6) 13(0.25,-2.6) 14(0.75,-2.6) 15(1.25,-2.6) 16(1.75,-2.6) 25(1.75,2.6) 26(1.25,2.6) 27(0.75,2.6) 28(0.25,2.6) 29(-0.25,2.6) 30(-0.75,2.6) 31(-1.25,2.6) 32(-1.75,2.6)
  round 0.457 hole 0.305: 33(-1.1,1.1) 34(0,1.1) 35(1.1,1.1) 36(1.1,0) 37(0,0) 38(-1.1,0) 39(-1.1,-1.1) 40(0,-1.1) 41(1.1,-1.1)
  Top region: -1.7,1.7 1.7,1.7 1.7,-1.7 -1.7,-1.7 -1.7,1.7
  silkscreen extent -3.81,-2.54 2.54,2.54
QFN32P-0.4X4M [mil]
  oval 30x8 smd: 1(-78.74,55.12) 2(-78.74,39.37) 3(-78.74,23.62) 4(-78.74,7.87) 5(-78.74,-7.87) 6(-78.74,-23.62) 7(-78.74,-39.37) 8(-78.74,-55.12) 17(78.74,-55.12) 18(78.74,-39.37) 19(78.74,-23.62) 20(78.74,-7.87) 21(78.74,7.87) 22(78.74,23.62) 23(78.74,39.37) 24(78.74,55.12)
  oval 8x30 smd: 9(-55.12,-78.74) 10(-39.37,-78.74) 11(-23.62,-78.74) 12(-7.87,-78.74) 13(7.87,-78.74) 14(23.62,-78.74) 15(39.37,-78.74) 16(55.12,-78.74) 25(55.12,78.74) 26(39.37,78.74) 27(23.62,78.74) 28(7.87,78.74) 29(-7.87,78.74) 30(-23.62,78.74) 31(-39.37,78.74) 32(-55.12,78.74)
  rect 107x107 / inner round 0 / far side rect 107x107 all layers, no hole: 33(0,0)
  silkscreen extent -79,-79 79,79
R0603 [mil]
  rect 30x40 smd: 1(-30,0) 2(30,0)
  silkscreen extent -55,-30 55,30
RJ45-8P8C$2F$LED [mm]
  rect 1.397x1.397 / inner round 1.397 / far side rect 1.397x1.397 hole 0.94: 1(3.57,2.54)
  round 1.397 hole 0.94: 2(2.55,4.32) 3(1.53,2.54) 4(0.51,4.32) 5(-0.51,2.54) 6(-1.53,4.32) 7(-2.55,2.54) 8(-3.57,4.32)
  round 1.524 hole 1.02: 9(6.86,9.13) 10(4.57,9.13) 11(-4.57,9.13) 12(-6.86,9.13)
  round 2.54 hole 1.8: 13(8.2,3.56) 14(-8.2,3.56)
  round 3.2 hole 3.2 unplated: 15(6.35,0) 16(-6.35,0)
  silkscreen extent -8.21,-5.34 8.21,10.3
SIM-CARD [mm]
  rect 2x1.2 smd: 1(25.22,3.81) 2(25.22,1.27) 3(25.22,-1.27) 4(25.22,-3.81) 5(0,3.81) 6(0,1.27) 7(0,-1.27) 8(0,-3.81)
  round 1.75 hole 1.75: 9(4.71,6)
  round 1.3 hole 1.3: 10(20.51,-6)
  silkscreen extent -3.48,-8.6 26.5,8.6
SIP$5C$2P-2.54M [mil]
  rect 60x60 / inner round 60 / far side rect 60x60 hole 35: 1(0,0)
  round 60 hole 35: 2(100,0)
  silkscreen extent -113,-50 150,50
SIP$5C$5P [mil]
  rect 60x60 / inner round 80 / far side rect 60x60 hole 40: 1(0,0)
  round 60 / inner round 80 / far side round 60 hole 40: 2(100,0) 3(200,0) 4(300,0) 5(400,0)
  silkscreen extent -60,-50 450,50
SIP-3P-2.54M [mil]
  rect 60x60 / inner round 60 / far side rect 60x60 hole 37: 1(0,0)
  round 60 hole 37: 2(100,0) 3(200,0)
  silkscreen extent -113,-50 250,50
SMTDR43 [mm]
  rect 3.115x1.6 smd: 1(0,1.2) 2(0,-1.2)
  Top pour cut-out: -1.778,2.032 -1.778,-2.032 1.778,-2.032 1.778,2.032 -1.778,2.032
  silkscreen extent -1.75,-0.25 1.75,0.25
SO-8-1.27X5.4M [mm]
  rect 0.635x1.5 smd: 1(0,0) 2(1.27,0) 3(2.54,0) 4(3.81,0) 5(3.81,5.4) 6(2.54,5.4) 7(1.27,5.4) 8(0,5.4)
  silkscreen extent -0.51,-1.56 4.32,4.19
SOIC-8P_208MIL [mil]
  rect 60x20 smd: 1(-159.5,75) 2(-159.5,25) 3(-159.5,-25) 4(-159.5,-75) 5(159.5,-75) 6(159.5,-25) 7(159.5,25) 8(159.5,75)
  silkscreen extent -110,-100 110,100
SOP8$2F$4.9$2F$0.65 [mil]
  oval 15x50 smd: 1(0,0) 2(25.59,0) 3(51.18,0) 4(76.77,0) 5(76.77,182.24) 6(51.18,182.24) 7(25.59,182.24) 8(0,182.24)
  silkscreen extent -25,-58 98,142
SOP16$2F$10.4$2F$1.27 [mm]
  oval 0.6x2 smd: 1(0,0) 2(1.27,0) 3(2.54,0) 4(3.81,0) 5(5.08,0) 6(6.35,0) 7(7.62,0) 8(8.89,0) 9(8.89,9.5) 10(7.62,9.5) 11(6.35,9.5) 12(5.08,9.5) 13(3.81,9.5) 14(2.54,9.5) 15(1.27,9.5) 16(0,9.5)
  silkscreen extent -0.64,-1.91 9.53,11.95
SOP16$2F$150 [mil]
  rect 25x80 smd: 1(-175,-100) 2(-125,-100) 3(-75,-100) 4(-25,-100) 5(25,-100) 6(75,-100) 7(125,-100) 8(175,-100) 9(175,100) 10(125,100) 11(75,100) 12(25,100) 13(-25,100) 14(-75,100) 15(-125,100) 16(-175,100)
  silkscreen extent -200,-50 200,50
SOP48-0.5MM [mm]
  oval 1x0.25 smd: 1(0.2,0) 2(0.2,-0.5) 3(0.2,-1) 4(0.2,-1.5) 5(0.2,-2) 6(0.2,-2.5) 7(0.2,-3) 8(0.2,-3.5) 9(0.2,-4) 10(0.2,-4.5) 11(0.2,-5) 12(0.2,-5.5) 13(0.2,-6) 14(0.2,-6.5) 15(0.2,-7) 16(0.2,-7.5) 17(0.2,-8) 18(0.2,-8.5) 19(0.2,-9) 20(0.2,-9.5) 21(0.2,-10) 22(0.2,-10.5) 23(0.2,-11) 24(0.2,-11.5) 25(20.45,-11.5) 26(20.45,-11) 27(20.45,-10.5) 28(20.45,-10) 29(20.45,-9.5) 30(20.45,-9) 31(20.45,-8.5) 32(20.45,-8) 33(20.45,-7.5) 34(20.45,-7) 35(20.45,-6.5) 36(20.45,-6) 37(20.45,-5.5) 38(20.45,-5) 39(20.45,-4.5) 40(20.45,-4) 41(20.45,-3.5) 42(20.45,-3) 43(20.45,-2.5) 44(20.45,-2) 45(20.45,-1.5) 46(20.45,-1) 47(20.45,-0.5) 48(20.45,0)
  silkscreen extent -1.5,-11.75 22.4,1
SOT23 [mil]
  rect 40x50 smd: 1(-38,0) 2(38,0) 3(0,70)
  silkscreen extent -68,-35 67,110
SOT23-BEC [mm]
  rect 0.914x1.27 smd: B(-0.95,-1.15) C(0,1.15) E(0.95,-1.15)
  silkscreen extent -1.46,-1.15 1.46,1.14
SOT23-GSD [mm]
  rect 0.914x1.27 smd: D(0,1.15) G(-0.95,-1.15) S(0.95,-1.15)
  silkscreen extent -1.46,-1.15 1.46,1.14
SOT-143 [mil]
  rect 45x50 smd: 1(0,0)
  rect 30x50 smd: 2(74.8,0) 3(74.8,100) 4(0,100)
  silkscreen extent -45,-42 110,120
SW4-SMD [mm]
  rect 1.524x2.048 smd: 1(-2.405,-4.06) 2(-2.405,4.06) 3(2.405,-4.06) 4(2.405,4.06)
  silkscreen extent -2.95,-6.35 2.29,2.29
SWDIP-2 [mil]
  rect 60x60 / inner round 60 / far side rect 60x60 hole 40: 1(0,0)
  round 60 hole 40: 2(100,0) 3(100,300) 4(0,300)
  silkscreen extent -50,-50 150,350
SWDIP-3-2.54X7.62M [mil]
  rect 60x60 / inner round 60 / far side rect 60x60 hole 40: 1(0,0)
  round 60 hole 40: 2(100,0) 3(200,0) 4(200,300) 5(100,300) 6(0,300)
  silkscreen extent -70,-50 270,350
SWDIP-4-2.54X7.62M [mil]
  rect 60x60 / inner round 60 / far side rect 60x60 hole 40: 1(0,0)
  round 60 hole 40: 2(100,0) 3(200,0) 4(300,0) 5(300,300) 6(200,300) 7(100,300) 8(0,300)
  silkscreen extent -70,-50 370,350
SWDIP-5-2.54X7.62M [mil]
  rect 60x60 / inner round 60 / far side rect 60x60 hole 40: 1(0,0)
  round 60 hole 40: 2(100,0) 3(200,0) 4(300,0) 5(400,0) 6(400,300) 7(300,300) 8(200,300) 9(100,300) 10(0,300)
  silkscreen extent -70,-50 470,350
SWDIP-6-2.54X7.62M [mil]
  rect 60x60 / inner round 60 / far side rect 60x60 hole 40: 1(0,0)
  round 60 hole 40: 2(100,0) 3(200,0) 4(300,0) 5(400,0) 6(500,0) 7(500,300) 8(400,300) 9(300,300) 10(200,300) 11(100,300) 12(0,300)
  silkscreen extent -70,-50 570,350
SWDIP-8-2.54X7.62M [mil]
  rect 60x60 / inner round 60 / far side rect 60x60 hole 40: 1(0,0)
  round 60 hole 40: 2(100,0) 3(200,0) 4(300,0) 5(400,0) 6(500,0) 7(600,0) 8(700,0) 9(700,300) 10(600,300) 11(500,300) 12(400,300) 13(300,300) 14(200,300) 15(100,300) 16(0,300)
  silkscreen extent -70,-50 770,350
SWDIP-10-2.54X7.62M [mil]
  rect 60x60 / inner round 60 / far side rect 60x60 hole 40: 1(0,0)
  round 60 hole 40: 2(100,0) 3(200,0) 4(300,0) 5(400,0) 6(500,0) 7(600,0) 8(700,0) 9(800,0) 10(900,0) 11(900,300) 12(800,300) 13(700,300) 14(600,300) 15(500,300) 16(400,300) 17(300,300) 18(200,300) 19(100,300) 20(0,300)
  silkscreen extent -70,-50 970,350
TDFN2X2-8 [mm]
  oval 0.3x0.7 smd: 1(-0.75,-1) 2(-0.25,-1) 3(0.25,-1) 4(0.75,-1) 5(0.75,1) 6(0.25,1) 7(-0.25,1) 8(-0.75,1)
  rect 1.6x1 smd: 9(0,0)
  silkscreen extent -1,-1 1,1
TS6121C [mil]
  oval 30x70 smd: 1(-175,-165.5) 2(-125,-165.5) 3(-75,-165.5) 4(-25,-165.5) 5(25,-165.5) 6(75,-165.5) 7(125,-165.5) 8(175,-165.5) 9(175,165.5) 10(125,165.5) 11(75,165.5) 12(25,165.5) 13(-25,165.5) 14(-75,165.5) 15(-125,165.5) 16(-175,165.5)
  silkscreen extent -225,-240 225,270
TSOT-25 [mm]
  rect 0.56x0.82 smd: 1(-0.95,-1.144) 2(0,-1.144) 3(0.95,-1.144)
  rect 0.56x0.62 smd: 4(0.95,1.144) 5(-0.95,1.144)
  silkscreen extent -1.49,-2.14 1.49,0.84
TXC-9H_T9 [mm]
  rrect0% 1.9x1.9 smd: 1(0,0) 2(0,-3.1)
  silkscreen extent -1.2,-4 1.2,0.95
USB4P [mm]
  rect 1.5x1.5 hole 1: 1(-3.3,0)
  round 1.5 hole 1: 2(-1.1,0) 3(1.1,0) 4(3.3,0)
  round 2.8 hole 2.3: 5(6.47,-2.71) 6(-6.47,-2.71)
  silkscreen extent -6.48,-13.36 6.47,2
VIA40N(F_MASK)4L [mil]
  round 40 all layers, no hole mask+40: 1(0,0)
  Keep-Out Layer pour cut-out: 75,0 69.29,28.7 53.03,53.03 28.7,69.29 0,75 0,75 -28.7,69.29 -53.03,53.03 -69.29,28.7 -75,0 -75,0 -69.29,-28.7 -53.03,-53.03 -28.7,-69.29 0,-75 0,-75 28.7,-69.29 53.03,-53.03 69.29,-28.7 75,0
  silkscreen extent -60,-60 60,60
XRGBBCNANF-27MHZ [mm]
  rect 1.5x0.9 smd: 1(-1.325,-0.775) 2(1.325,-0.775) 3(1.325,0.775) 4(-1.325,0.775)
  silkscreen extent -1.6,-1.91 1.6,1.25

## Via types
v1: diameter 24, hole 12, Top to Bottom, 897 vias
v2: diameter 30, hole 16, Top to Bottom, 628 vias
v3: diameter 20, hole 10, Top to Bottom, 4 vias

## Nets (pads, with @x,y where several pads share a name; then routed paths per layer and width w, separated by ;. In a path a pad name is that pad's centre, name@x,y a point inside that pad or via, vN(x,y) a via of type N, cw(c..) or ccw(c..) an arc to the next point about the centre after c; other vN are vias at no path point)
5VIN: CT2.2 CT83.2 CT84.2 D3.2 J1.2 R2.2 R3.1 R4.2 U1.1 U17.2 U17.3 U18.2 U18.3 | length 9008.6
  Top w10: 881,7205 895.47,7205 U1.1@895.47,7210.63
  Top w15: U18.2@1137.5,2375.59 1183.59,2375.59 v2(1196.59,2388.59) 1184,2401.18 U18.3@1137.5,2401.18 ; U17.2@1150,2013.09 1205.09,2013.09 v2(1215.34,2023.34) 1200,2038.68 U17.3@1150,2038.68
  Top w40: D3.2@523,3104 523,3136 587,3200 v2(912,3200) ; J1.2@787.5,7062.5 R2.2@895,7062.5 895,7112 ; v2(840,7112) 895,7112 ; v2(840,7152) 879,7152 881,7161 ; 881,7205 881,7161 ; R3.1@1050,7430 v2(1050,7472) ; R4.2@1112.5,7207.5 1688,7207.5 1824,7071.5 v2(1824,7040) v2(1824,7008) ; v2(1196.6,4715.84) 1197,4715.84 1237.24,4756.08 1441.16,4960 2176,4960 2256,5040 2256,6064 2208,6112 v2(1936,6112) v2(1904,6112) ; 881,7161 882,7161 895,7148 CT2.2@895,7137.5 895,7112
  Bottom w40: v2(1196.59,2388.59) 1141.41,2388.59 CT84.2@1137.5,2392.5 984.5,2392.5 ; v2(1215.34,2023.34) 1156.66,2023.34 CT83.2@1150,2030 986,2030 960,2056 960,2368 984.5,2392.5 ; v2(1236.75,4756.57) v2(1196.6,4715.84) 1177.3,4696.47 1177.3,4642.38 1176.14,4048.66 1071.48,3944 944,3944 912,3912 v2(912,3200) 912,2736 960,2688 960,2417 984.5,2392.5 ; v2(1824,7040) v2(1824,7008) 1824,6152 1864,6112 v2(1904,6112) v2(1936,6112)
50MCLKI: C18.1 R54.2 U9.10 | length 250.4
  Top w8: U9.10@1828.24,4010.13 1853.87,4010.13 1864,4000 ; C18.1@1987.5,4005 C18.1@1987.5,4010.13
  Top w10: 1864,4000 1888,3976 1928,3976 1957,4005 C18.1@1987.5,4005 ; C18.1@1987.5,4010.13 R54.2@1987.5,4070
ADCO: SW20.13 U11.10 | length 1590.6
  Top w8: U11.10@1299.21,5614.86 1299.21,5643.21 1368,5712 v1(1440,5712)
  Bottom w8: v1(1440,5712) 1568,5712 1584,5728 1584,5896 1608,5920 2096,5920 2136,5880 2136,5523.5 SW20.13@2037.5,5425
AUXO1: C27.2 U11.21 | length 257.8
  Top w8: C27.2@892.5,5500 892.5,5502.66 U11.21@1147.64,5502.66
AUXO2: C31.2 U11.22 | length 290.6
  Top w8: C31.2@892.5,5425 892.5,5444.5 930.97,5482.97 U11.22@1147.64,5482.97
BCLK: SW20.11 U11.8 | length 1297.2
  Top w8: U11.8@1352.36,5581.4 1376,5581.4 1384,5589.4 1384,5656 1392,5664 v1(1440,5664)
  Bottom w8: v1(1440,5664) 1584,5664 1616,5696 1616,5872 1632,5888 2080,5888 2104,5864 2104,5691.5 SW20.11@2037.5,5625
BLEN: CON20.4 RL18.2 | length 594.7
  Top w8: RL18.2@8030,4775 8064,4775 8127,4712 8528.75,4712 CON20.4@8578.15,4662.6
CAN0H: CON30.1 U12.7 | length 263.1
  Top w8: CON30.1@4212.5,5450 4256,5406.5 4256,5282.5 4237.5,5264 U12.7@4237.5,5212.6
CAN0L: CON30.2 U12.6 | length 260.6
  Top w8: U12.6@4287.5,5212.6 4287.5,5264 4272,5279.5 4272,5409.5 CON30.2@4312.5,5450
CAN0RS: SW22.4 SW22.5 SW22.6 U12.8 | length 784.3
  Top w8: U12.8@4187.5,5212.6 4187.5,5168 4203.5,5152 4512,5152 4537.5,5177.5 SW22.6@4537.5,5350 SW22.5@4637.5,5350 SW22.4@4737.5,5350
CAN0RX: SW21.4 U12.4 | length 1014.1
  Top w8: SW21.4@3912.5,5350 3840,5277.5 3840,4944 3864,4920 4321.5,4920 4337.5,4936 U12.4@4337.5,5000
CAN0TX: SW21.3 U12.1 | length 858.2
  Top w8: SW21.3@4012.5,5350 3856,5193.5 3856,4952 3872,4936 4176,4936 4187.5,4947.5 U12.1@4187.5,5000